# EAGLE board wavtrigger-Panel-v11 (EAGLE 6.5.0), part 1 of 3
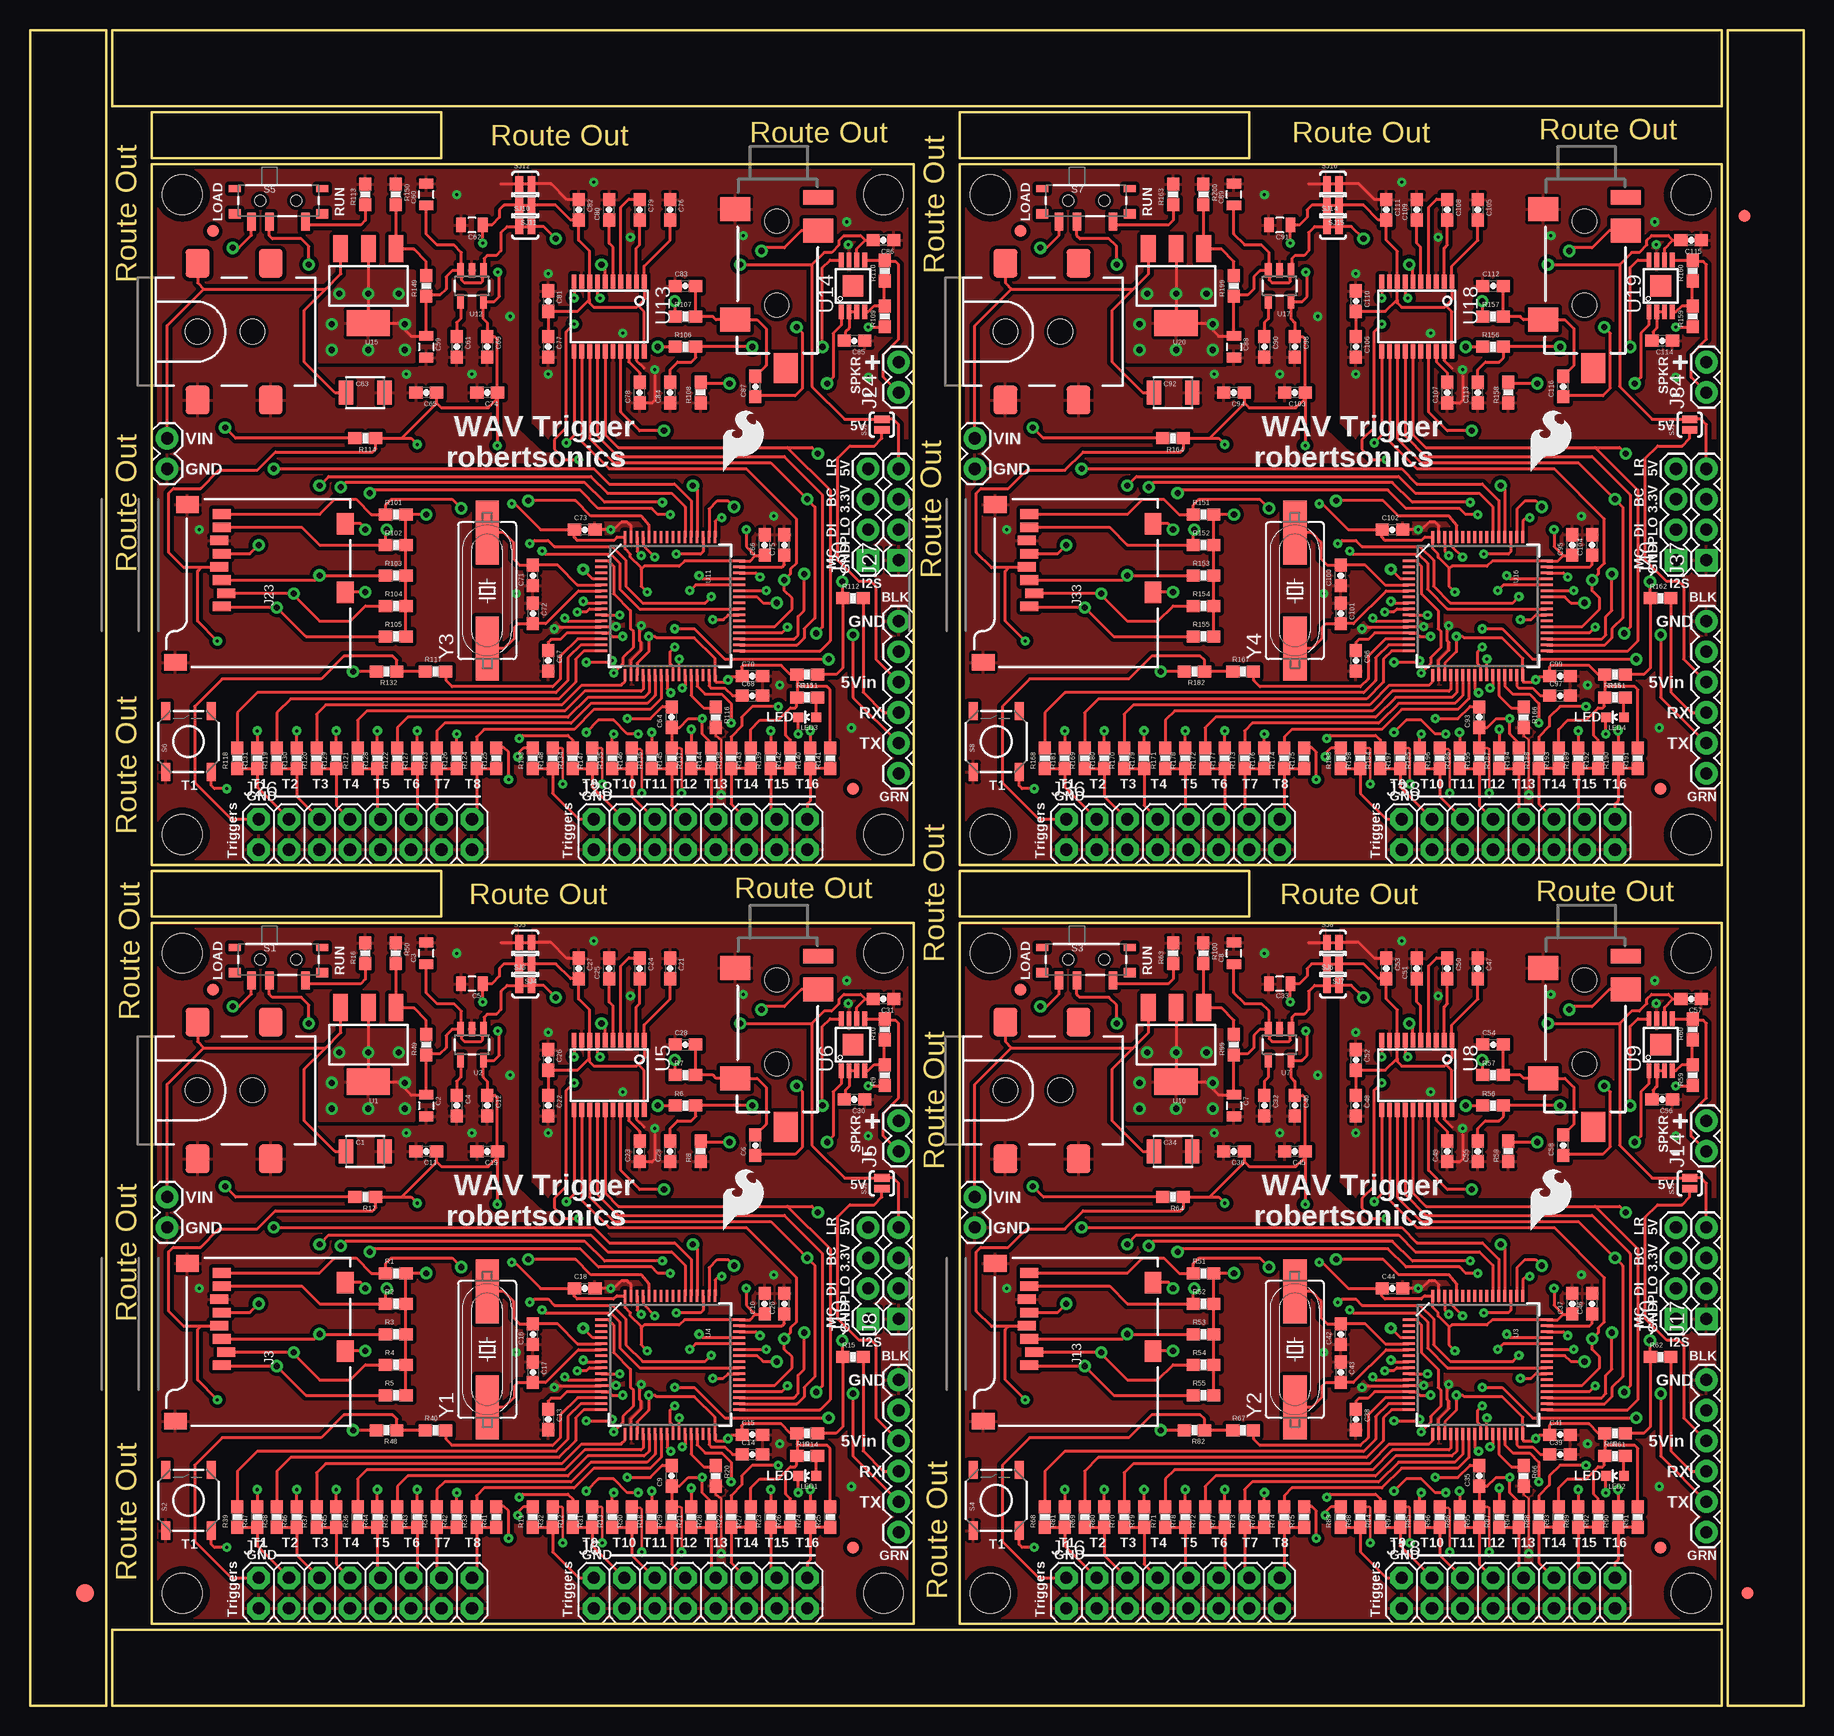
[diagram p0: board, top side]
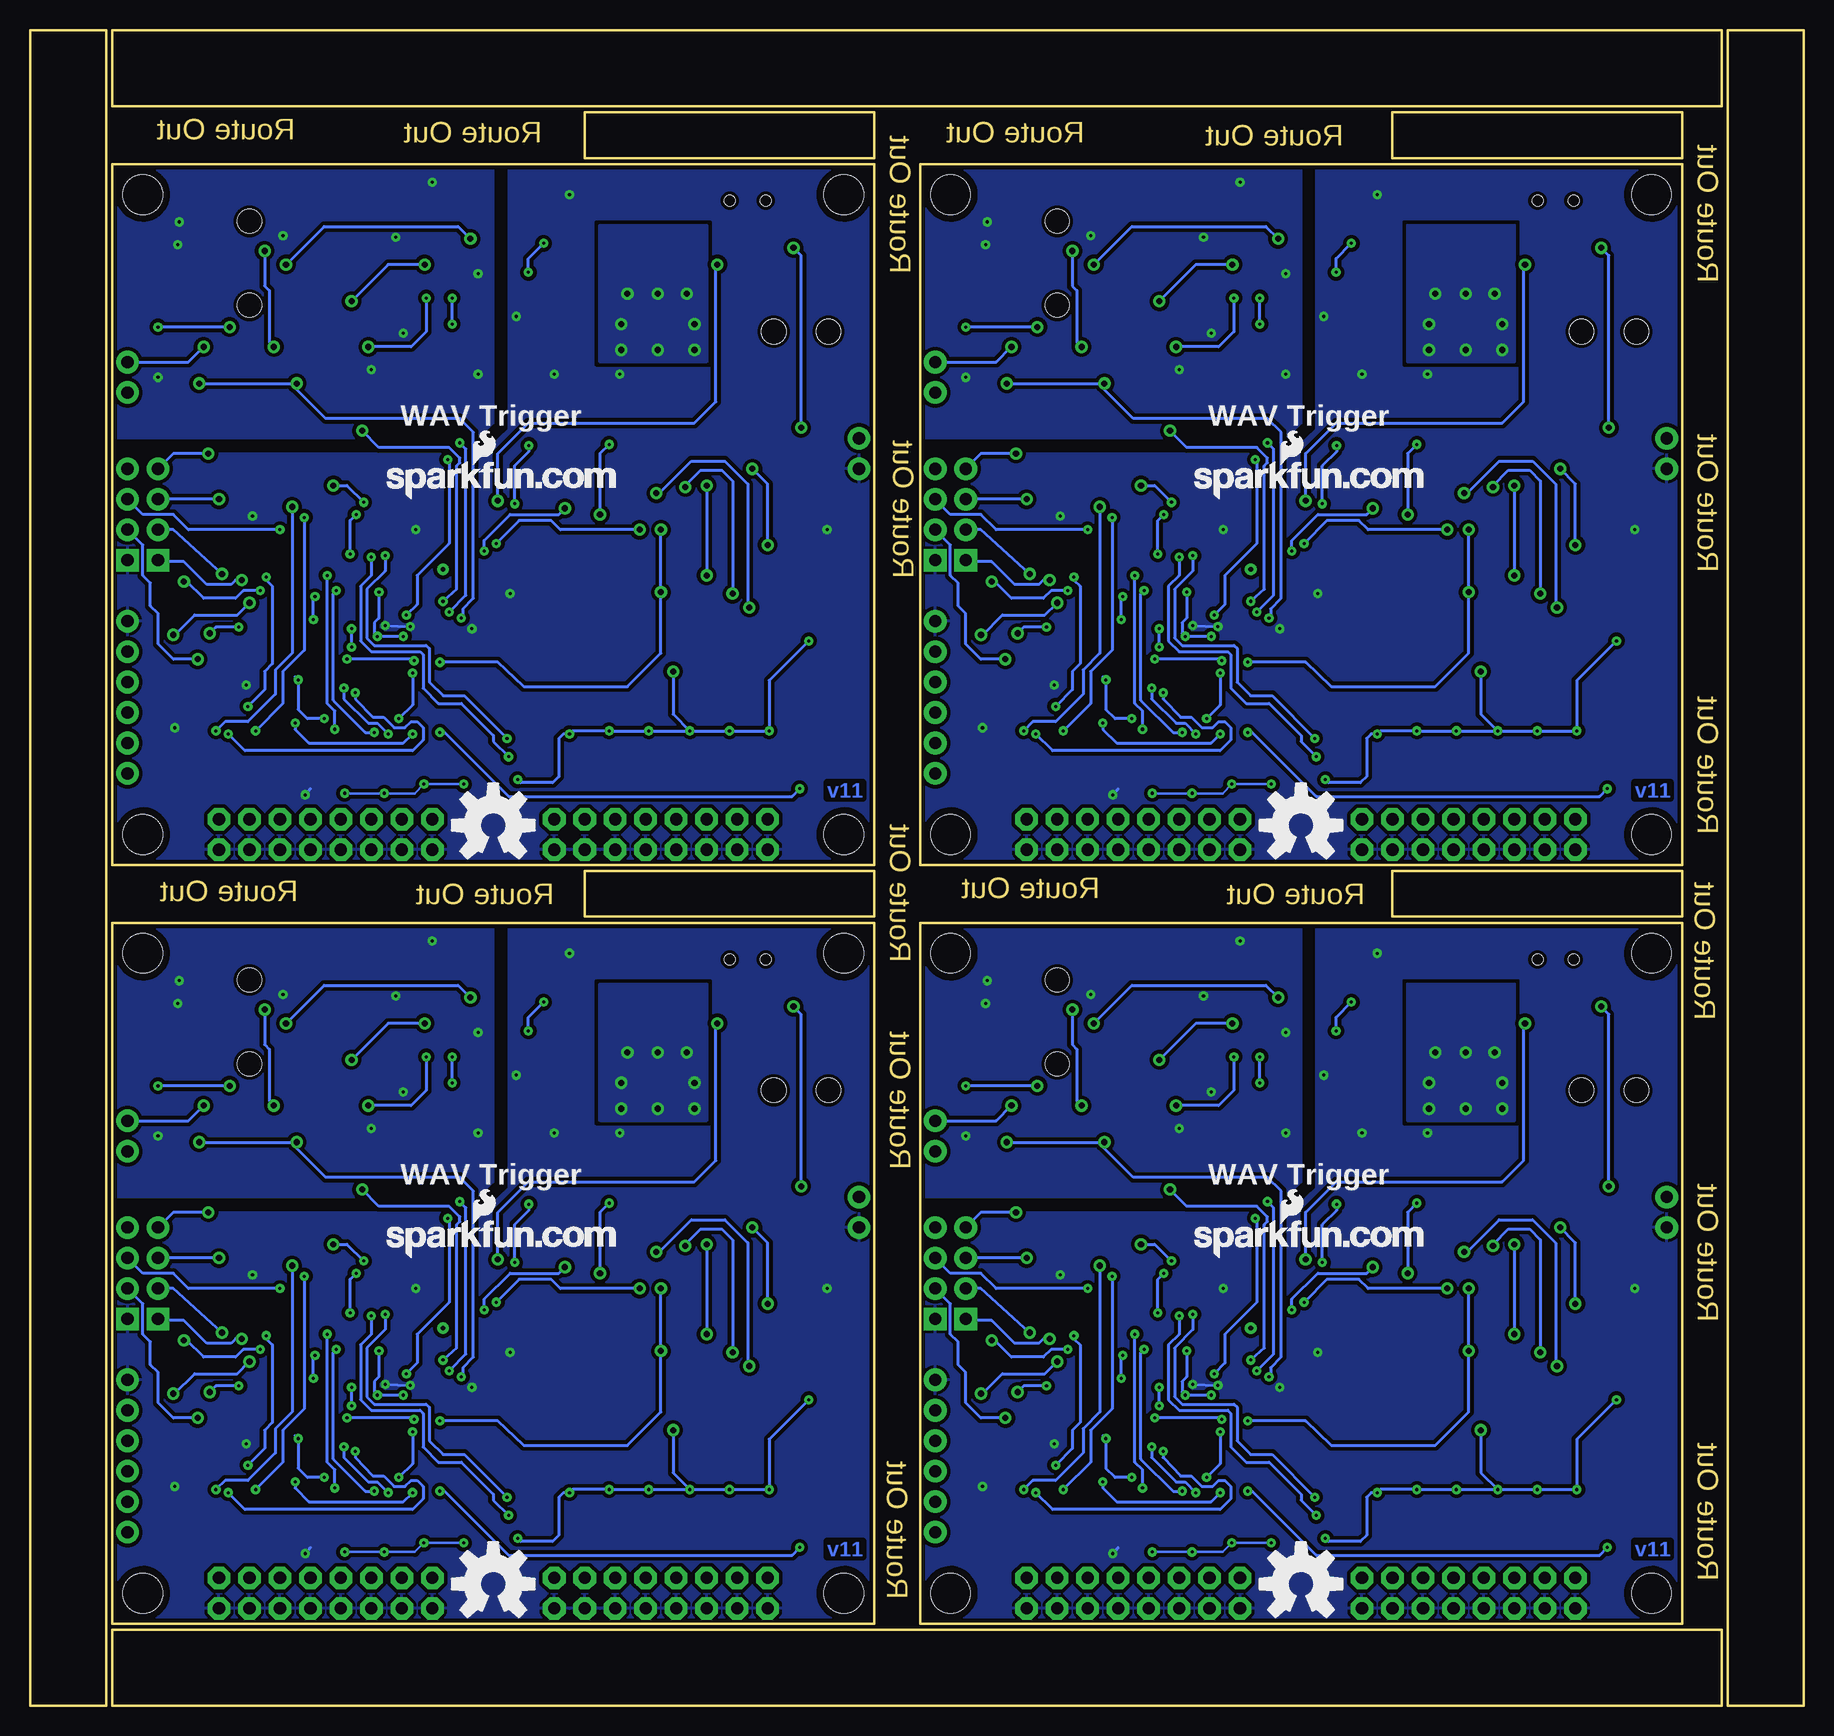
[diagram p1: board, bottom side, seen from below]

Size 147.83 x 139.7 mm. Coordinates in mm from the lower left corner, seen from the top.
Outline: 6.35,79.25 6.35,0 0,0 0,29.72
Outline: 0,28.45 0,139.7 6.35,139.7 6.35,77.98
Outline: 82.55,0 6.86,0 6.86,6.35 33.02,6.35
Outline: 29.21,6.35 140.97,6.35 140.97,0 78.74,0
Outline: 147.83,72.39 147.83,0 141.48,0 141.48,22.86
Outline: 141.48,21.59 141.48,139.7 147.83,139.7 147.83,71.12
Outline: 26.67,139.7 140.97,139.7 140.97,133.35 76.2,133.35
Outline: 82.55,133.35 6.86,133.35 6.86,139.7 33.02,139.7
Outline: 10.16,6.86 73.66,6.86 73.66,65.28 10.16,65.27 10.16,6.86
Outline: 77.47,6.86 140.97,6.86 140.97,65.28 77.47,65.27 77.47,6.86
Outline: 10.16,70.1 73.66,70.1 73.66,128.52 10.16,128.51 10.16,70.1
Outline: 77.47,70.1 140.97,70.1 140.97,128.52 77.47,128.51 77.47,70.1
Outline: 77.47,65.79 101.6,65.79 101.6,69.6 77.47,69.6 77.47,65.79
Outline: 10.16,129.03 34.29,129.03 34.29,132.84 10.16,132.84 10.16,129.03
Outline: 77.47,129.03 101.6,129.03 101.6,132.84 77.47,132.84 77.47,129.03
Outline: 10.16,65.79 34.29,65.79 34.29,69.6 10.16,69.6 10.16,65.79
Copper layers (1*16): Top 0.035mm / dielectric 1.5mm / Bottom 0.035mm
Design rules "SparkFun": minimum track width 8mil, minimum drill 20mil, track to track 8mil, track to pad 8mil, pad to pad 8mil, via to via 8mil, smd to smd 8mil, copper to edge 8mil, drill to drill 8mil, minimum pad ring 12mil, minimum via ring 10mil, stop-mask expansion 4mil, vias tented up to drill 20mil, thermal gap 10mil

## Footprints (pad centres in the part's own frame; a part is rotated, then mirrored left to right if it is on the bottom)
1210 = smd 1.2 x 2: 1 -1.6,0; 2 1.6,0
0805 = smd 0.8 x 1.2: 1 -0.9,0; 2 0.9,0
0603-CAP = smd 1.1 x 1: 1 -0.85,0; 2 0.85,0
FIDUCIAL-1.5X3 = smd 1.5 x 1.5: 1 0,0
FIDUCIAL-1X2 = smd 1 x 1: 1 0,0
POWER_JACK_SMD_OVERPASTE_REDBOARD_0603 = smd 2 x 2.4: GND 0,-5.7; P$4 6.1,-5.7; VIN0 0,5.7; VIN1 6.1,5.7 | hole 2.032: 0,0; 4.572,0
AUDIO-JACK-3.5MM-SMD = smd 2 x 2.5: RING 4.3,3.45; SLEEVE 2.5,-3.45; TIP 11.7,-3.45 | smd 1.2 x 2.5: RSH 1.5,3.45 | smd 2.5 x 2: TSH 15.75,0.75 | hole 2: 3.5,0; 10.5,0
MICRO-SD-SOCKET-PP = smd 0.8 x 1.5: 1 -8.94,10.7; 2 -7.84,10.3; 3 -6.74,10.7; 4 -5.64,10.9; 5 -4.54,10.7; 6 -3.44,10.9; 7 -2.34,10.7; 8 -1.24,10.7 | smd 1.8 x 1.4: CD1 -2.05,0.4; CD2 -7.75,0.4 | smd 1.4 x 1.9: GND1 -13.6,14.55; GND3 -0.45,13.55
1X06 = drill 1.016 pad 1.88: 1 0,0; 2 2.54,0; 3 5.08,0; 4 7.62,0; 5 10.16,0; 6 12.7,0
1X02 = drill 1.016 pad 1.88: 1 0,0; 2 2.54,0
2X8 = drill 1.016 pad 1.88 octagon: 1 0,0; 2 0,2.54; 3 2.54,0; 4 2.54,2.54; 5 5.08,0; 6 5.08,2.54; 7 7.62,0; 8 7.62,2.54; 9 10.16,0; 10 10.16,2.54; 11 12.7,0; 12 12.7,2.54; 13 15.24,0; 14 15.24,2.54; 15 17.78,0; 16 17.78,2.54
1X04 = drill 1.016 pad 1.88 square: 1 0,0 | drill 1.016 pad 1.88: 2 2.54,0; 3 5.08,0; 4 7.62,0
LED-0603 = smd 0.8 x 0.8: A 0,-0.75; C 0,0.75
0603-RES = smd 1.1 x 1: 1 -0.85,0; 2 0.85,0
SWITCH-SPST-SMD-A = smd 0.7 x 1.5: 1 -2.25,-1.75; 2 -0.75,-1.75; 3 2.25,-1.75 | smd 1 x 0.6: GND1 -3.65,1; GND3 3.65,1 | smd 1 x 0.8: GND2 -3.65,-1.1; GND4 3.65,-1.1 | hole 0.9: -1.5,0; 1.5,0
TACTILE_SWITCH_SMD = smd 1.524 x 0.762: 1 -2.54,1.905; 2 2.54,1.905; 3 -2.54,-1.905; 4 2.54,-1.905
SJ_2S-NO = smd 0.635 x 1.27: 1 -0.45,0; 2 0.45,0
SJ_2S-TRACE = smd 0.635 x 1.27: 1 -0.508,0; 2 0.508,0
STAND-OFF = hole 3.302: 0,0
TP_15TH = drill 0.381 pad 0.61: P$1 0,0
SOT223 = smd 1.219 x 2.235: 1 -2.311,-3.099; 2 0,-3.099; 3 2.311,-3.099 | smd 3.6 x 2.2: 4 0,3.099
SOT23-5 = smd 0.55 x 1.2: 1 -0.95,-1.3; 2 0,-1.3; 3 0.95,-1.3; 4 0.95,1.3; 5 -0.95,1.3
TQFP64 = smd 0.22 x 1: 1 -3.75,-5.75; 2 -3.25,-5.75; 3 -2.75,-5.75; 4 -2.25,-5.75; 5 -1.75,-5.75; 6 -1.25,-5.75; 7 -0.75,-5.75; 8 -0.25,-5.75; 9 0.25,-5.75; 10 0.75,-5.75; 11 1.25,-5.75; 12 1.75,-5.75; 13 2.25,-5.75; 14 2.75,-5.75; 15 3.25,-5.75; 16 3.75,-5.75; 33 3.75,5.75; 34 3.25,5.75; 35 2.75,5.75; 36 2.25,5.75; 37 1.75,5.75; 38 1.25,5.75; 39 0.75,5.75; 40 0.25,5.75; 41 -0.25,5.75; 42 -0.75,5.75; 43 -1.25,5.75; 44 -1.75,5.75; 45 -2.25,5.75; 46 -2.75,5.75; 47 -3.25,5.75; 48 -3.75,5.75 | smd 1 x 0.22: 17 5.75,-3.75; 18 5.75,-3.25; 19 5.75,-2.75; 20 5.75,-2.25; 21 5.75,-1.75; 22 5.75,-1.25; 23 5.75,-0.75; 24 5.75,-0.25; 25 5.75,0.25; 26 5.75,0.75; 27 5.75,1.25; 28 5.75,1.75; 29 5.75,2.25; 30 5.75,2.75; 31 5.75,3.25; 32 5.75,3.75; 49 -5.75,3.75; 50 -5.75,3.25; 51 -5.75,2.75; 52 -5.75,2.25; 53 -5.75,1.75; 54 -5.75,1.25; 55 -5.75,0.75; 56 -5.75,0.25; 57 -5.75,-0.25; 58 -5.75,-0.75; 59 -5.75,-1.25; 60 -5.75,-1.75; 61 -5.75,-2.25; 62 -5.75,-2.75; 63 -5.75,-3.25; 64 -5.75,-3.75
PW_R-PDSO-G20 = smd 0.4 x 1.2: 1 -2.925,-2.9; 2 -2.275,-2.9; 3 -1.625,-2.9; 4 -0.975,-2.9; 5 -0.325,-2.9; 6 0.325,-2.9; 7 0.975,-2.9; 8 1.625,-2.9; 9 2.275,-2.9; 10 2.925,-2.9; 11 2.925,2.9; 12 2.275,2.9; 13 1.625,2.9; 14 0.975,2.9; 15 0.325,2.9; 16 -0.325,2.9; 17 -0.975,2.9; 18 -1.625,2.9; 19 -2.275,2.9; 20 -2.925,2.9
S-PDSO-G08 = smd 0.4 x 1.2: 1 -0.975,-2.157; 2 -0.325,-2.157; 3 0.325,-2.157; 4 0.975,-2.157; 5 0.975,2.157; 6 0.325,2.157; 7 -0.325,2.157; 8 -0.975,2.157 | smd 1.73 x 1.78: TH 0,0
HC49UP = smd 5.334 x 1.93: 1 -4.826,0; 2 4.826,0

## Placement (x,y rotation side)
C1  10uF  [1210]  27.94,46.23 0 top
C2  10uF  [0805]  33.02,50.04 270 top
C3  2.2uF  [0805]  33.02,62.74 90 top
C4  0.1uF  [0603-CAP]  35.56,50.04 270 top
C5  2.2uF  [0805]  36.83,60.2 180 top
C6  .39uF  [0603-CAP]  60.45,46.74 90 top
C7  10uF  [0805]  100.33,50.04 270 top
C8  2.2uF  [0805]  100.33,62.74 90 top
C9  0.1uF  [0603-CAP]  53.47,19.18 90 top
C10  0.1uF  [0603-CAP]  61.21,33.53 90 top
C11  1uF  [0603-CAP]  33.02,46.23 180 top
C12  4.7uF  [0603-CAP]  38.1,50.04 270 top
C13  0.1uF  [0603-CAP]  43.18,23.88 270 top
C14  2.2uF  [0603-CAP]  60.2,20.95 0 top
C15  0.1uF  [0603-CAP]  60.2,22.61 0 top
C16  33pF  [0603-CAP]  41.91,30.99 90 top
C17  33pF  [0603-CAP]  41.91,27.81 270 top
C18  0.1uF  [0603-CAP]  46.23,34.8 0 top
C19  0.1uF  [0603-CAP]  38.1,46.23 180 top
C20  2.2uF  [0603-CAP]  62.87,33.53 90 top
C21  0.1uF  [0603-CAP]  53.34,61.47 270 top
C22  0.1uF  [0603-CAP]  43.18,50.04 270 top
C23  0.1uF  [0603-CAP]  50.8,46.23 90 top
C24  2.2uF  [0603-CAP]  50.8,61.47 270 top
C25  2.2uF  [0603-CAP]  48.26,61.47 90 top
C26  0.1uF  [0603-CAP]  43.18,53.85 270 top
C27  10uF  [0603-CAP]  45.72,61.47 270 top
C28  2200pF  [0603-CAP]  54.61,55.12 0 top
C29  2200pF  [0603-CAP]  53.34,46.23 90 top
C30  1uF  [0603-CAP]  68.71,50.55 180 top
C31  1uF  [0603-CAP]  71.12,58.93 180 top
C32  0.1uF  [0603-CAP]  102.87,50.04 270 top
C33  2.2uF  [0805]  104.14,60.2 180 top
C34  10uF  [1210]  95.25,46.23 0 top
C35  0.1uF  [0603-CAP]  120.78,19.18 90 top
C36  1uF  [0603-CAP]  100.33,46.23 180 top
C37  0.1uF  [0603-CAP]  128.52,33.53 90 top
C38  0.1uF  [0603-CAP]  110.49,23.88 270 top
C39  2.2uF  [0603-CAP]  127.51,20.95 0 top
C40  4.7uF  [0603-CAP]  105.41,50.04 270 top
C41  0.1uF  [0603-CAP]  127.51,22.61 0 top
C42  33pF  [0603-CAP]  109.22,30.99 90 top
C43  33pF  [0603-CAP]  109.22,27.81 270 top
C44  0.1uF  [0603-CAP]  113.54,34.8 0 top
C45  0.1uF  [0603-CAP]  105.41,46.23 180 top
C46  2.2uF  [0603-CAP]  130.18,33.53 90 top
C47  0.1uF  [0603-CAP]  120.65,61.47 270 top
C48  0.1uF  [0603-CAP]  110.49,50.04 270 top
C49  0.1uF  [0603-CAP]  118.11,46.23 90 top
C50  2.2uF  [0603-CAP]  118.11,61.47 270 top
C51  2.2uF  [0603-CAP]  115.57,61.47 90 top
C52  0.1uF  [0603-CAP]  110.49,53.85 270 top
C53  10uF  [0603-CAP]  113.03,61.47 270 top
C54  2200pF  [0603-CAP]  121.92,55.12 0 top
C55  2200pF  [0603-CAP]  120.65,46.23 90 top
C56  1uF  [0603-CAP]  136.02,50.55 180 top
C57  1uF  [0603-CAP]  138.43,58.93 180 top
C58  .39uF  [0603-CAP]  127.76,46.74 90 top
C59  10uF  [0805]  33.02,113.28 270 top
C60  2.2uF  [0805]  33.02,125.98 90 top
C61  0.1uF  [0603-CAP]  35.56,113.28 270 top
C62  2.2uF  [0805]  36.83,123.44 180 top
C63  10uF  [1210]  27.94,109.47 0 top
C64  0.1uF  [0603-CAP]  53.47,82.42 90 top
C65  1uF  [0603-CAP]  33.02,109.47 180 top
C66  0.1uF  [0603-CAP]  61.21,96.77 90 top
C67  0.1uF  [0603-CAP]  43.18,87.12 270 top
C68  2.2uF  [0603-CAP]  60.2,84.2 0 top
C69  4.7uF  [0603-CAP]  38.1,113.28 270 top
C70  0.1uF  [0603-CAP]  60.2,85.85 0 top
C71  33pF  [0603-CAP]  41.91,94.23 90 top
C72  33pF  [0603-CAP]  41.91,91.06 270 top
C73  0.1uF  [0603-CAP]  46.23,98.04 0 top
C74  0.1uF  [0603-CAP]  38.1,109.47 180 top
C75  2.2uF  [0603-CAP]  62.87,96.77 90 top
C76  0.1uF  [0603-CAP]  53.34,124.71 270 top
C77  0.1uF  [0603-CAP]  43.18,113.28 270 top
C78  0.1uF  [0603-CAP]  50.8,109.47 90 top
C79  2.2uF  [0603-CAP]  50.8,124.71 270 top
C80  2.2uF  [0603-CAP]  48.26,124.71 90 top
C81  0.1uF  [0603-CAP]  43.18,117.09 270 top
C82  10uF  [0603-CAP]  45.72,124.71 270 top
C83  2200pF  [0603-CAP]  54.61,118.36 0 top
C84  2200pF  [0603-CAP]  53.34,109.47 90 top
C85  1uF  [0603-CAP]  68.71,113.79 180 top
C86  1uF  [0603-CAP]  71.12,122.17 180 top
C87  .39uF  [0603-CAP]  60.45,109.98 90 top
C88  10uF  [0805]  100.33,113.28 270 top
C89  2.2uF  [0805]  100.33,125.98 90 top
C90  0.1uF  [0603-CAP]  102.87,113.28 270 top
C91  2.2uF  [0805]  104.14,123.44 180 top
C92  10uF  [1210]  95.25,109.47 0 top
C93  0.1uF  [0603-CAP]  120.78,82.42 90 top
C94  1uF  [0603-CAP]  100.33,109.47 180 top
C95  0.1uF  [0603-CAP]  128.52,96.77 90 top
C96  0.1uF  [0603-CAP]  110.49,87.12 270 top
C97  2.2uF  [0603-CAP]  127.51,84.2 0 top
C98  4.7uF  [0603-CAP]  105.41,113.28 270 top
C99  0.1uF  [0603-CAP]  127.51,85.85 0 top
C100  33pF  [0603-CAP]  109.22,94.23 90 top
C101  33pF  [0603-CAP]  109.22,91.06 270 top
C102  0.1uF  [0603-CAP]  113.54,98.04 0 top
C103  0.1uF  [0603-CAP]  105.41,109.47 180 top
C104  2.2uF  [0603-CAP]  130.18,96.77 90 top
C105  0.1uF  [0603-CAP]  120.65,124.71 270 top
C106  0.1uF  [0603-CAP]  110.49,113.28 270 top
C107  0.1uF  [0603-CAP]  118.11,109.47 90 top
C108  2.2uF  [0603-CAP]  118.11,124.71 270 top
C109  2.2uF  [0603-CAP]  115.57,124.71 90 top
C110  0.1uF  [0603-CAP]  110.49,117.09 270 top
C111  10uF  [0603-CAP]  113.03,124.71 270 top
C112  2200pF  [0603-CAP]  121.92,118.36 0 top
C113  2200pF  [0603-CAP]  120.65,109.47 90 top
C114  1uF  [0603-CAP]  136.02,113.79 180 top
C115  1uF  [0603-CAP]  138.43,122.17 180 top
C116  .39uF  [0603-CAP]  127.76,109.98 90 top
E$1  [FIDUCIAL-1.5X3]  4.57,9.4 0 top
E$5  [FIDUCIAL-1X2]  143.13,9.4 0 top
E$6  [FIDUCIAL-1X2]  142.88,124.21 180 top
FID1  FIDUCIAL1X2  [FIDUCIAL-1X2]  15.24,59.69 0 top
FID2  FIDUCIAL1X2  [FIDUCIAL-1X2]  68.58,13.21 0 top
FID3  FIDUCIAL1X2  [FIDUCIAL-1X2]  82.55,59.69 0 top
FID4  FIDUCIAL1X2  [FIDUCIAL-1X2]  135.89,13.21 0 top
FID5  FIDUCIAL1X2  [FIDUCIAL-1X2]  15.24,122.94 0 top
FID6  FIDUCIAL1X2  [FIDUCIAL-1X2]  68.58,76.45 0 top
FID7  FIDUCIAL1X2  [FIDUCIAL-1X2]  82.55,122.94 0 top
FID8  FIDUCIAL1X2  [FIDUCIAL-1X2]  135.89,76.45 0 top
J1  5.5x2.1mm Barrel  [POWER_JACK_SMD_OVERPASTE_REDBOARD_0603]  13.97,51.31 0 top
J2  [AUDIO-JACK-3.5MM-SMD]  62.23,64.01 270 top
J3  USD-SOCKETNEW  [MICRO-SD-SOCKET-PP]  26.67,37.34 90 top
J4  [1X06]  72.39,27.18 270 top
J5  M02PTH  [1X02]  72.39,46.23 90 top
J6  M08X2  [2X8]  46.99,8.13 0 top
J7  M08X2  [2X8]  19.05,8.13 0 top
J8  [1X04]  72.39,32.26 90 top
J9  M02PTH  [1X02]  11.43,39.88 90 top
J10  [1X04]  69.85,32.26 90 top
J11  5.5x2.1mm Barrel  [POWER_JACK_SMD_OVERPASTE_REDBOARD_0603]  81.28,51.31 0 top
J12  [AUDIO-JACK-3.5MM-SMD]  129.54,64.01 270 top
J13  USD-SOCKETNEW  [MICRO-SD-SOCKET-PP]  93.98,37.34 90 top
J14  M02PTH  [1X02]  139.7,46.23 90 top
J15  [1X06]  139.7,27.18 270 top
J16  M08X2  [2X8]  86.36,8.13 0 top
J17  [1X04]  139.7,32.26 90 top
J18  M08X2  [2X8]  114.3,8.13 0 top
J19  M02PTH  [1X02]  78.74,39.88 90 top
J20  [1X04]  137.16,32.26 90 top
J21  5.5x2.1mm Barrel  [POWER_JACK_SMD_OVERPASTE_REDBOARD_0603]  13.97,114.55 0 top
J22  [AUDIO-JACK-3.5MM-SMD]  62.23,127.25 270 top
J23  USD-SOCKETNEW  [MICRO-SD-SOCKET-PP]  26.67,100.58 90 top
J24  M02PTH  [1X02]  72.39,109.47 90 top
J25  [1X06]  72.39,90.42 270 top
J26  M08X2  [2X8]  19.05,71.37 0 top
J27  [1X04]  72.39,95.5 90 top
J28  M08X2  [2X8]  46.99,71.37 0 top
J29  M02PTH  [1X02]  11.43,103.12 90 top
J30  [1X04]  69.85,95.5 90 top
J31  5.5x2.1mm Barrel  [POWER_JACK_SMD_OVERPASTE_REDBOARD_0603]  81.28,114.55 0 top
J32  [AUDIO-JACK-3.5MM-SMD]  129.54,127.25 270 top
J33  USD-SOCKETNEW  [MICRO-SD-SOCKET-PP]  93.98,100.58 90 top
J34  M02PTH  [1X02]  139.7,109.47 90 top
J35  [1X06]  139.7,90.42 270 top
J36  M08X2  [2X8]  86.36,71.37 0 top
J37  [1X04]  139.7,95.5 90 top
J38  M08X2  [2X8]  114.3,71.37 0 top
J39  M02PTH  [1X02]  78.74,103.12 90 top
J40  [1X04]  137.16,95.5 90 top
LED1  [LED-0603]  64.77,19.18 90 top
LED2  [LED-0603]  132.08,19.18 90 top
LED3  [LED-0603]  64.77,82.42 90 top
LED4  [LED-0603]  132.08,82.42 90 top
LOGO1  OSHW-LOGOL  [OSHW-LOGO-L]  41.91,10.16 0 bottom
LOGO2  LOGO-SFENEW  [SFE-NEW-WEBLOGO]  50.8,37.34 0 bottom
LOGO3  OSHW-LOGOL  [OSHW-LOGO-L]  109.22,10.16 0 bottom
LOGO4  SFE_LOGO_FLAME.2_INCH  [SFE_LOGO_FLAME_.2]  57.4,39.37 0 top
LOGO5  LOGO-SFENEW  [SFE-NEW-WEBLOGO]  118.11,37.34 0 bottom
LOGO6  SFE_LOGO_FLAME.2_INCH  [SFE_LOGO_FLAME_.2]  124.71,39.37 0 top
LOGO7  OSHW-LOGOL  [OSHW-LOGO-L]  41.91,73.41 0 bottom
LOGO8  LOGO-SFENEW  [SFE-NEW-WEBLOGO]  50.8,100.58 0 bottom
LOGO9  SFE_LOGO_FLAME.2_INCH  [SFE_LOGO_FLAME_.2]  57.4,102.62 0 top
LOGO10  OSHW-LOGOL  [OSHW-LOGO-L]  109.22,73.41 0 bottom
LOGO11  LOGO-SFENEW  [SFE-NEW-WEBLOGO]  118.11,100.58 0 bottom
LOGO12  SFE_LOGO_FLAME.2_INCH  [SFE_LOGO_FLAME_.2]  124.71,102.62 0 top
R1  47K  [0603-RES]  30.48,36.07 0 top
R2  47K  [0603-RES]  30.48,33.53 0 top
R3  47K  [0603-RES]  30.48,30.99 0 top
R4  47K  [0603-RES]  30.48,28.45 0 top
R5  47K  [0603-RES]  30.48,25.91 0 top
R6  470  [0603-RES]  54.61,50.04 0 top
R7  470  [0603-RES]  54.61,52.58 0 top
R8  10K  [0603-RES]  55.88,46.23 90 top
R9  22K  [0603-RES]  71.25,52.58 90 top
R10  10K  [0603-RES]  71.25,56.39 90 top
R11  100  [0603-RES]  41.91,15.75 90 top
R12  100  [0603-RES]  45.21,15.75 90 top
R13  100  [0603-RES]  48.51,15.75 90 top
R14  10K  [0603-RES]  64.77,22.73 180 top
R15  100  [0603-RES]  68.58,29.08 0 top
R16  10K  [0603-RES]  27.94,62.74 90 top
R17  10K  [0603-RES]  27.94,42.42 180 top
R18  100  [0603-RES]  51.82,15.75 90 top
R19  330  [0603-RES]  64.77,20.83 0 top
R20  10K  [0603-RES]  57.15,19.18 270 top
R21  100  [0603-RES]  55.12,15.75 90 top
R22  100  [0603-RES]  58.42,15.75 90 top
R23  100  [0603-RES]  61.72,15.75 90 top
R24  100  [0603-RES]  65.02,15.75 90 top
R25  DNP  [0603-RES]  66.67,15.75 90 top
R26  DNP  [0603-RES]  63.37,15.75 90 top
R27  DNP  [0603-RES]  60.07,15.75 90 top
R28  DNP  [0603-RES]  56.77,15.75 90 top
R29  DNP  [0603-RES]  53.47,15.75 90 top
R30  DNP  [0603-RES]  50.16,15.75 90 top
R31  DNP  [0603-RES]  46.86,15.75 90 top
R32  DNP  [0603-RES]  43.56,15.75 90 top
R33  100  [0603-RES]  37.21,15.75 90 top
R34  100  [0603-RES]  33.91,15.75 90 top
R35  100  [0603-RES]  30.61,15.75 90 top
R36  100  [0603-RES]  27.3,15.75 90 top
R37  100  [0603-RES]  23.88,15.75 90 top
R38  100  [0603-RES]  20.57,15.75 90 top
R39  100  [0603-RES]  17.27,15.75 90 top
R40  100  [0603-RES]  33.78,22.99 0 top
R41  DNP  [0603-RES]  38.86,15.75 90 top
R42  DNP  [0603-RES]  35.56,15.75 90 top
R43  DNP  [0603-RES]  32.26,15.75 90 top
R44  DNP  [0603-RES]  28.96,15.75 90 top
R45  DNP  [0603-RES]  25.53,15.75 90 top
R46  DNP  [0603-RES]  22.23,15.75 90 top
R47  DNP  [0603-RES]  18.92,15.75 90 top
R48  DNP  [0603-RES]  29.72,22.99 180 top
R49  240  [0603-RES]  33.02,55.12 90 top
R50  715  [0603-RES]  30.48,62.74 270 top
R51  47K  [0603-RES]  97.79,36.07 0 top
R52  47K  [0603-RES]  97.79,33.53 0 top
R53  47K  [0603-RES]  97.79,30.99 0 top
R54  47K  [0603-RES]  97.79,28.45 0 top
R55  47K  [0603-RES]  97.79,25.91 0 top
R56  470  [0603-RES]  121.92,50.04 0 top
R57  470  [0603-RES]  121.92,52.58 0 top
R58  10K  [0603-RES]  123.19,46.23 90 top
R59  22K  [0603-RES]  138.56,52.58 90 top
R60  10K  [0603-RES]  138.56,56.39 90 top
R61  10K  [0603-RES]  132.08,22.73 180 top
R62  100  [0603-RES]  135.89,29.08 0 top
R63  10K  [0603-RES]  95.25,62.74 90 top
R64  10K  [0603-RES]  95.25,42.42 180 top
R65  330  [0603-RES]  132.08,20.83 0 top
R66  10K  [0603-RES]  124.46,19.18 270 top
R67  100  [0603-RES]  101.09,22.99 0 top
R68  100  [0603-RES]  84.58,15.75 90 top
R69  100  [0603-RES]  87.88,15.75 90 top
R70  100  [0603-RES]  91.19,15.75 90 top
R71  100  [0603-RES]  94.61,15.75 90 top
R72  100  [0603-RES]  97.92,15.75 90 top
R73  100  [0603-RES]  101.22,15.75 90 top
R74  100  [0603-RES]  104.52,15.75 90 top
R75  DNP  [0603-RES]  106.17,15.75 90 top
R76  DNP  [0603-RES]  102.87,15.75 90 top
R77  DNP  [0603-RES]  99.57,15.75 90 top
R78  DNP  [0603-RES]  96.27,15.75 90 top
R79  DNP  [0603-RES]  92.84,15.75 90 top
R80  DNP  [0603-RES]  89.53,15.75 90 top
R81  DNP  [0603-RES]  86.23,15.75 90 top
R82  DNP  [0603-RES]  97.03,22.99 180 top
R83  100  [0603-RES]  109.22,15.75 90 top
R84  100  [0603-RES]  112.52,15.75 90 top
R85  100  [0603-RES]  115.82,15.75 90 top
R86  100  [0603-RES]  119.13,15.75 90 top
R87  100  [0603-RES]  122.43,15.75 90 top
R88  100  [0603-RES]  125.73,15.75 90 top
R89  100  [0603-RES]  129.03,15.75 90 top
R90  100  [0603-RES]  132.33,15.75 90 top
R91  DNP  [0603-RES]  133.99,15.75 90 top
R92  DNP  [0603-RES]  130.68,15.75 90 top
R93  DNP  [0603-RES]  127.38,15.75 90 top
R94  DNP  [0603-RES]  124.08,15.75 90 top
R95  DNP  [0603-RES]  120.78,15.75 90 top
R96  DNP  [0603-RES]  117.47,15.75 90 top
R97  DNP  [0603-RES]  114.17,15.75 90 top
R98  DNP  [0603-RES]  110.87,15.75 90 top
R99  240  [0603-RES]  100.33,55.12 90 top
R100  715  [0603-RES]  97.79,62.74 270 top
R101  47K  [0603-RES]  30.48,99.31 0 top
R102  47K  [0603-RES]  30.48,96.77 0 top
R103  47K  [0603-RES]  30.48,94.23 0 top
R104  47K  [0603-RES]  30.48,91.69 0 top
R105  47K  [0603-RES]  30.48,89.15 0 top
R106  470  [0603-RES]  54.61,113.28 0 top
R107  470  [0603-RES]  54.61,115.82 0 top
R108  10K  [0603-RES]  55.88,109.47 90 top
R109  22K  [0603-RES]  71.25,115.82 90 top
R110  10K  [0603-RES]  71.25,119.63 90 top
R111  10K  [0603-RES]  64.77,85.98 180 top
R112  100  [0603-RES]  68.58,92.33 0 top
R113  10K  [0603-RES]  27.94,125.98 90 top
R114  10K  [0603-RES]  27.94,105.66 180 top
R115  330  [0603-RES]  64.77,84.07 0 top
R116  10K  [0603-RES]  57.15,82.42 270 top
R117  100  [0603-RES]  33.78,86.23 0 top
R118  100  [0603-RES]  17.27,78.99 90 top
R119  100  [0603-RES]  20.57,78.99 90 top
R120  100  [0603-RES]  23.88,78.99 90 top
R121  100  [0603-RES]  27.3,78.99 90 top
R122  100  [0603-RES]  30.61,78.99 90 top
R123  100  [0603-RES]  33.91,78.99 90 top
R124  100  [0603-RES]  37.21,78.99 90 top
R125  DNP  [0603-RES]  38.86,78.99 90 top
R126  DNP  [0603-RES]  35.56,78.99 90 top
R127  DNP  [0603-RES]  32.26,78.99 90 top
R128  DNP  [0603-RES]  28.96,78.99 90 top
R129  DNP  [0603-RES]  25.53,78.99 90 top
R130  DNP  [0603-RES]  22.23,78.99 90 top
R131  DNP  [0603-RES]  18.92,78.99 90 top
R132  DNP  [0603-RES]  29.72,86.23 180 top
R133  100  [0603-RES]  41.91,78.99 90 top
R134  100  [0603-RES]  45.21,78.99 90 top
R135  100  [0603-RES]  48.51,78.99 90 top
R136  100  [0603-RES]  51.82,78.99 90 top
R137  100  [0603-RES]  55.12,78.99 90 top
R138  100  [0603-RES]  58.42,78.99 90 top
R139  100  [0603-RES]  61.72,78.99 90 top
R140  100  [0603-RES]  65.02,78.99 90 top
R141  DNP  [0603-RES]  66.67,78.99 90 top
R142  DNP  [0603-RES]  63.37,78.99 90 top
R143  DNP  [0603-RES]  60.07,78.99 90 top
R144  DNP  [0603-RES]  56.77,78.99 90 top
R145  DNP  [0603-RES]  53.47,78.99 90 top
R146  DNP  [0603-RES]  50.16,78.99 90 top
R147  DNP  [0603-RES]  46.86,78.99 90 top
R148  DNP  [0603-RES]  43.56,78.99 90 top
R149  240  [0603-RES]  33.02,118.36 90 top
R150  715  [0603-RES]  30.48,125.98 270 top
R151  47K  [0603-RES]  97.79,99.31 0 top
R152  47K  [0603-RES]  97.79,96.77 0 top
R153  47K  [0603-RES]  97.79,94.23 0 top
R154  47K  [0603-RES]  97.79,91.69 0 top
R155  47K  [0603-RES]  97.79,89.15 0 top
R156  470  [0603-RES]  121.92,113.28 0 top
R157  470  [0603-RES]  121.92,115.82 0 top
R158  10K  [0603-RES]  123.19,109.47 90 top
R159  22K  [0603-RES]  138.56,115.82 90 top
R160  10K  [0603-RES]  138.56,119.63 90 top
R161  10K  [0603-RES]  132.08,85.98 180 top
R162  100  [0603-RES]  135.89,92.33 0 top
R163  10K  [0603-RES]  95.25,125.98 90 top
R164  10K  [0603-RES]  95.25,105.66 180 top
R165  330  [0603-RES]  132.08,84.07 0 top
R166  10K  [0603-RES]  124.46,82.42 270 top
R167  100  [0603-RES]  101.09,86.23 0 top
R168  100  [0603-RES]  84.58,78.99 90 top
R169  100  [0603-RES]  87.88,78.99 90 top
R170  100  [0603-RES]  91.19,78.99 90 top
R171  100  [0603-RES]  94.61,78.99 90 top
R172  100  [0603-RES]  97.92,78.99 90 top
R173  100  [0603-RES]  101.22,78.99 90 top
R174  100  [0603-RES]  104.52,78.99 90 top
R175  DNP  [0603-RES]  106.17,78.99 90 top
R176  DNP  [0603-RES]  102.87,78.99 90 top
R177  DNP  [0603-RES]  99.57,78.99 90 top
R178  DNP  [0603-RES]  96.27,78.99 90 top
R179  DNP  [0603-RES]  92.84,78.99 90 top
R180  DNP  [0603-RES]  89.53,78.99 90 top
R181  DNP  [0603-RES]  86.23,78.99 90 top
R182  DNP  [0603-RES]  97.03,86.23 180 top
R183  100  [0603-RES]  109.22,78.99 90 top
R184  100  [0603-RES]  112.52,78.99 90 top
R185  100  [0603-RES]  115.82,78.99 90 top
R186  100  [0603-RES]  119.13,78.99 90 top
R187  100  [0603-RES]  122.43,78.99 90 top
R188  100  [0603-RES]  125.73,78.99 90 top
R189  100  [0603-RES]  129.03,78.99 90 top
R190  100  [0603-RES]  132.33,78.99 90 top
R191  DNP  [0603-RES]  133.99,78.99 90 top
R192  DNP  [0603-RES]  130.68,78.99 90 top
R193  DNP  [0603-RES]  127.38,78.99 90 top
R194  DNP  [0603-RES]  124.08,78.99 90 top
R195  DNP  [0603-RES]  120.78,78.99 90 top
R196  DNP  [0603-RES]  117.47,78.99 90 top
R197  DNP  [0603-RES]  114.17,78.99 90 top
R198  DNP  [0603-RES]  110.87,78.99 90 top
R199  240  [0603-RES]  100.33,118.36 90 top
R200  715  [0603-RES]  97.79,125.98 270 top
S1  [SWITCH-SPST-SMD-A]  20.7,62.23 0 top
S2  SWITCH-MOMENTARY-2SMD  [TACTILE_SWITCH_SMD]  13.21,17.14 90 top
S3  [SWITCH-SPST-SMD-A]  88.01,62.23 0 top
S4  SWITCH-MOMENTARY-2SMD  [TACTILE_SWITCH_SMD]  80.52,17.14 90 top
S5  [SWITCH-SPST-SMD-A]  20.7,125.48 0 top
S6  SWITCH-MOMENTARY-2SMD  [TACTILE_SWITCH_SMD]  13.21,80.39 90 top
S7  [SWITCH-SPST-SMD-A]  88.01,125.48 0 top
S8  SWITCH-MOMENTARY-2SMD  [TACTILE_SWITCH_SMD]  80.52,80.39 90 top
SJ1  SOLDERJUMPERNO  [SJ_2S-NO]  138.3,43.56 90 top
SJ2  SOLDERJUMPERNO  [SJ_2S-NO]  70.99,43.56 90 top
SJ3  SOLDERJUMPERTRACE  [SJ_2S-TRACE]  41.27,60.07 0 top
SJ4  SOLDERJUMPERTRACE  [SJ_2S-TRACE]  41.27,61.85 180 top
SJ5  SOLDERJUMPERTRACE  [SJ_2S-TRACE]  41.27,63.63 0 top
SJ6  SOLDERJUMPERTRACE  [SJ_2S-TRACE]  108.58,60.07 0 top
SJ7  SOLDERJUMPERTRACE  [SJ_2S-TRACE]  108.58,61.85 180 top
SJ8  SOLDERJUMPERTRACE  [SJ_2S-TRACE]  108.58,63.63 0 top
SJ9  SOLDERJUMPERNO  [SJ_2S-NO]  70.99,106.81 90 top
SJ10  SOLDERJUMPERTRACE  [SJ_2S-TRACE]  41.27,123.32 0 top
SJ11  SOLDERJUMPERTRACE  [SJ_2S-TRACE]  41.27,125.09 180 top
SJ12  SOLDERJUMPERTRACE  [SJ_2S-TRACE]  41.27,126.87 0 top
SJ13  SOLDERJUMPERNO  [SJ_2S-NO]  138.3,106.81 90 top
SJ14  SOLDERJUMPERTRACE  [SJ_2S-TRACE]  108.58,123.32 0 top
SJ15  SOLDERJUMPERTRACE  [SJ_2S-TRACE]  108.58,125.09 180 top
SJ16  SOLDERJUMPERTRACE  [SJ_2S-TRACE]  108.58,126.87 0 top
STANDOFF1  STAND-OFF  [STAND-OFF]  12.7,9.4 0 top
STANDOFF2  STAND-OFF  [STAND-OFF]  71.12,9.4 0 top
STANDOFF3  STAND-OFF  [STAND-OFF]  12.7,62.74 0 top
STANDOFF4  STAND-OFF  [STAND-OFF]  71.12,62.74 0 top
STANDOFF5  STAND-OFF  [STAND-OFF]  80.01,9.4 0 top
STANDOFF6  STAND-OFF  [STAND-OFF]  138.43,9.4 0 top
STANDOFF7  STAND-OFF  [STAND-OFF]  80.01,62.74 0 top
STANDOFF8  STAND-OFF  [STAND-OFF]  138.43,62.74 0 top
STANDOFF9  STAND-OFF  [STAND-OFF]  12.7,72.64 0 top
STANDOFF10  STAND-OFF  [STAND-OFF]  71.12,72.64 0 top
STANDOFF11  STAND-OFF  [STAND-OFF]  12.7,125.98 0 top
STANDOFF12  STAND-OFF  [STAND-OFF]  71.12,125.98 0 top
STANDOFF13  STAND-OFF  [STAND-OFF]  80.01,72.64 0 top
STANDOFF14  STAND-OFF  [STAND-OFF]  138.43,72.64 0 top
STANDOFF15  STAND-OFF  [STAND-OFF]  80.01,125.98 0 top
STANDOFF16  STAND-OFF  [STAND-OFF]  138.43,125.98 0 top
TP1  TEST-POINTTP_15TH_THRU  [TP_15TH]  46.1,31.5 0 top
TP2  TEST-POINTTP_15TH_THRU  [TP_15TH]  113.41,31.5 0 top
TP3  TEST-POINTTP_15TH_THRU  [TP_15TH]  46.1,94.74 0 top
TP4  TEST-POINTTP_15TH_THRU  [TP_15TH]  113.41,94.74 0 top
U1  [SOT223]  28.19,55.12 180 top
U2  MIC5323-3.3  [SOT23-5]  36.83,55.12 180 top
U3  STM32F405RG  [TQFP64]  120.65,28.45 270 top
U4  STM32F405RG  [TQFP64]  53.34,28.45 270 top
U5  PCM5100  [PW_R-PDSO-G20]  48.26,52.58 180 top
U6  LM4990  [S-PDSO-G08]  68.58,55.12 0 top
U7  MIC5323-3.3  [SOT23-5]  104.14,55.12 180 top
U8  PCM5100  [PW_R-PDSO-G20]  115.57,52.58 180 top
U9  LM4990  [S-PDSO-G08]  135.89,55.12 0 top
U10  [SOT223]  95.5,55.12 180 top
U11  STM32F405RG  [TQFP64]  53.34,91.69 270 top
U12  MIC5323-3.3  [SOT23-5]  36.83,118.36 180 top
U13  PCM5100  [PW_R-PDSO-G20]  48.26,115.82 180 top
U14  LM4990  [S-PDSO-G08]  68.58,118.36 0 top
U15  [SOT223]  28.19,118.36 180 top
U16  STM32F405RG  [TQFP64]  120.65,91.69 270 top
U17  MIC5323-3.3  [SOT23-5]  104.14,118.36 180 top
U18  PCM5100  [PW_R-PDSO-G20]  115.57,115.82 180 top
U19  LM4990  [S-PDSO-G08]  135.89,118.36 0 top
U20  [SOT223]  95.5,118.36 180 top
Y1  8MHz  [HC49UP]  38.1,29.72 90 top
Y2  8MHz  [HC49UP]  105.41,29.72 90 top
Y3  8MHz  [HC49UP]  38.1,92.96 90 top
Y4  8MHz  [HC49UP]  105.41,92.96 90 top

## Library data of the parts
C1 C34 C63 C92 = SparkFun-Capacitors; PROD_ID: CAP-09824
C2 C3 C5 C7 C8 C33 C59 C60 C62 C88 C89 C91 = SparkFun-Capacitors; PROD_ID: CAP-08064
C4 C6 C9-C32 C35-C58 C61 C64-C87 C90 C93-C116 = SparkFun-Capacitors
E$1 = SparkFun-Retired
E$5 E$6 FID1-FID8 LOGO1-LOGO12 = SparkFun-Aesthetics
J1 J11 J21 J31 = Testing
J2 J4-J10 J12 J14-J20 J22 J24-J30 J32 J34-J40 = SparkFun-Connectors
J3 J13 J23 J33 U5 U6 U8 U9 U13 U14 U18 U19 = robertsonics
LED1-LED4 = SparkFun-LED
R1-R48 R51-R98 R101-R148 R151-R198 SJ1-SJ16 TP1-TP4 = SparkFun-Passives
R49 R99 R149 R199 = SparkFun-Resistors; PROD_ID: RES-07849
R50 R100 R150 R200 = SparkFun-Resistors
S1-S8 STANDOFF1-STANDOFF16 = SparkFun-Electromechanical
U1 U10 U15 U20 = SparkFun-PowerIC
U2 U7 U12 U17 = SparkFun-PowerIC; PROD_ID: VREG-00822
U3 U4 U11 U16 = SparkFun-DigitalIC
Y1-Y4 = SparkFun-FreqCtrl

## Nets
+5V: C2.1 C3.1 C31.2 J8.4 R49.1 SJ2.2 SJ3.1 SJ3.2 U1.2 U1.4 U2.1 U2.3 U6.6
+5V1: C7.1 C8.1 C57.2 J17.4 R99.1 SJ1.2 SJ6.1 SJ6.2 U7.1 U7.3 U9.6 U10.2 U10.4
+5V2: C59.1 C60.1 C86.2 J27.4 R149.1 SJ9.2 SJ10.1 SJ10.2 U12.1 U12.3 U14.6 U15.2 U15.4
+5V3: C88.1 C89.1 C115.2 J37.4 R199.1 SJ13.2 SJ14.1 SJ14.2 U17.1 U17.3 U19.6 U20.2 U20.4
AMPENA: R8.2 U4.11 U6.1
AMPENA1: R58.2 U3.11 U9.1
AMPENA2: R108.2 U11.11 U14.1
AMPENA3: R158.2 U16.11 U19.1
BOOT0: S1.2 U4.60
BOOT1: S3.2 U3.60
BOOT2: S5.2 U11.60
BOOT3: S7.2 U16.60
BUTTON: S2.3 U4.27
BUTTON1: S4.3 U3.27
BUTTON2: S6.3 U11.27
BUTTON3: S8.3 U16.27
DEMP: U4.10 U5.10
DEMP1: U3.10 U8.10
DEMP2: U11.10 U13.10
DEMP3: U16.10 U18.10
FILTER: U4.9 U5.11
FILTER1: U3.9 U8.11
FILTER2: U11.9 U13.11
FILTER3: U16.9 U18.11
GND: C1.2 C2.2 C3.2 C4.2 C5.2 C10.2 C11.2 C12.2 C13.2 C14.2 C15.2 C16.1 C17.1 C18.2 C19.2 C20.2 C21.1 C22.2 C23.1 C25.2 C26.1 C27.1 C28.1 C29.1 C30.1 C31.1 J1.GND J1.P$4 J2.SLEEVE J3.6 J3.GND1 J3.GND3 J4.1 J6.1 J6.3 J6.5 J6.7 J6.9 J6.11 J6.13 J6.15 J7.1 J7.3 J7.5 J7.7 J7.9 J7.11 J7.13 J7.15 J8.1 J9.1 R8.1 R16.2 R20.2 R50.1 S2.1 SJ5.1 SJ5.2 U2.2 U4.12 U4.18 U4.63 U5.3 U5.9 U5.16 U5.19 U6.7
GND1: C7.2 C8.2 C32.2 C33.2 C34.2 C36.2 C37.2 C38.2 C39.2 C40.2 C41.2 C42.1 C43.1 C44.2 C45.2 C46.2 C47.1 C48.2 C49.1 C51.2 C52.1 C53.1 C54.1 C55.1 C56.1 C57.1 J11.GND J11.P$4 J12.SLEEVE J13.6 J13.GND1 J13.GND3 J15.1 J16.1 J16.3 J16.5 J16.7 J16.9 J16.11 J16.13 J16.15 J17.1 J18.1 J18.3 J18.5 J18.7 J18.9 J18.11 J18.13 J18.15 J19.1 R58.1 R63.2 R66.2 R100.1 S4.1 SJ8.1 SJ8.2 U3.12 U3.18 U3.63 U7.2 U8.3 U8.9 U8.16 U8.19 U9.7
GND2: C59.2 C60.2 C61.2 C62.2 C63.2 C65.2 C66.2 C67.2 C68.2 C69.2 C70.2 C71.1 C72.1 C73.2 C74.2 C75.2 C76.1 C77.2 C78.1 C80.2 C81.1 C82.1 C83.1 C84.1 C85.1 C86.1 J21.GND J21.P$4 J22.SLEEVE J23.6 J23.GND1 J23.GND3 J25.1 J26.1 J26.3 J26.5 J26.7 J26.9 J26.11 J26.13 J26.15 J27.1 J28.1 J28.3 J28.5 J28.7 J28.9 J28.11 J28.13 J28.15 J29.1 R108.1 R113.2 R116.2 R150.1 S6.1 SJ12.1 SJ12.2 U11.12 U11.18 U11.63 U12.2 U13.3 U13.9 U13.16 U13.19 U14.7
GND3: C88.2 C89.2 C90.2 C91.2 C92.2 C94.2 C95.2 C96.2 C97.2 C98.2 C99.2 C100.1 C101.1 C102.2 C103.2 C104.2 C105.1 C106.2 C107.1 C109.2 C110.1 C111.1 C112.1 C113.1 C114.1 C115.1 J31.GND J31.P$4 J32.SLEEVE J33.6 J33.GND1 J33.GND3 J35.1 J36.1 J36.3 J36.5 J36.7 J36.9 J36.11 J36.13 J36.15 J37.1 J38.1 J38.3 J38.5 J38.7 J38.9 J38.11 J38.13 J38.15 J39.1 R158.1 R163.2 R166.2 R200.1 S8.1 SJ16.1 SJ16.2 U16.12 U16.18 U16.63 U17.2 U18.3 U18.9 U18.16 U18.19 U19.7
I2S_BCLK: J10.3 U4.34 U5.13
I2S_BCLK1: J20.3 U3.34 U8.13
I2S_BCLK2: J30.3 U11.34 U13.13
I2S_BCLK3: J40.3 U16.34 U18.13
I2S_DI: J10.2 U4.35
I2S_DI1: J20.2 U3.35
I2S_DI2: J30.2 U11.35
I2S_DI3: J40.2 U16.35
I2S_DOUT: U4.36 U5.14
I2S_DOUT1: U3.36 U8.14
I2S_DOUT2: U11.36 U13.14
I2S_DOUT3: U16.36 U18.14
I2S_LRCK: J10.4 U4.33 U5.15
I2S_LRCK1: J20.4 U3.33 U8.15
I2S_LRCK2: J30.4 U11.33 U13.15
I2S_LRCK3: J40.4 U16.33 U18.15
I2S_MCLK: J10.1 U4.37 U5.12
I2S_MCLK1: J20.1 U3.37 U8.12
I2S_MCLK2: J30.1 U11.37 U13.12
I2S_MCLK3: J40.1 U16.37 U18.12
LED1: LED1.C U4.24
LED2: LED2.C U3.24
LED3: LED3.C U11.24
LED4: LED4.C U16.24
LOUTL: C6.2 C28.2 J2.TIP R7.2
LOUTL1: C54.2 C58.2 J12.TIP R57.2
LOUTL2: C83.2 C87.2 J22.TIP R107.2
LOUTL3: C112.2 C116.2 J32.TIP R157.2
LOUTR: C29.2 J2.RING R6.2
LOUTR1: C55.2 J12.RING R56.2
LOUTR2: C84.2 J22.RING R106.2
LOUTR3: C113.2 J32.RING R156.2
MUTE: U4.8 U5.17
MUTE1: U3.8 U8.17
MUTE2: U11.8 U13.17
MUTE3: U16.8 U18.17
N$1: J6.2 R11.1 R32.1
N$2: C4.1 U2.4
N$3: C9.2 U4.1
N$4: C14.1 U4.31
N$5: C16.2 U4.5 Y1.2
N$6: C17.2 U4.6 Y1.1
N$7: R16.1 S1.3
N$8: C20.1 U4.47
N$9: J4.4 R15.2
N$10: R17.2 S1.1
N$11: LED1.A R19.2
N$12: R20.1 U4.28
N$13: R49.2 R50.2 U1.1
N$14: C23.2 U5.18
N$15: R6.1 U5.7
N$16: C24.2 U5.2
N$17: C24.1 U5.4
N$18: C25.1 U5.5
N$19: R7.1 U5.6
N$20: C30.2 U6.2 U6.3
N$21: C6.1 R9.1
N$22: TP1.P$1 U4.4
N$23: J6.4 R12.1 R31.1
N$24: J6.6 R13.1 R30.1
N$25: J6.8 R18.1 R29.1
N$26: J6.10 R21.1 R28.1
N$27: J6.12 R22.1 R27.1
N$28: J6.14 R23.1 R26.1
N$29: R9.2 R10.1 U6.4
N$30: J6.16 R24.1 R25.1
N$31: C32.1 U7.4
N$32: J4.3 SJ2.1
N$33: C35.2 U3.1
N$34: C39.1 U3.31
N$35: J7.2 R40.1 R48.1
N$36: J7.4 R39.1 R47.1
N$37: J7.6 R38.1 R46.1
N$38: J7.8 R37.1 R45.1
N$39: J7.10 R36.1 R44.1
N$40: J7.12 R35.1 R43.1
N$41: J7.14 R34.1 R42.1
N$42: J7.16 R33.1 R41.1
N$43: C42.2 U3.5 Y2.2
N$44: C43.2 U3.6 Y2.1
N$45: C46.1 U3.47
N$46: C49.2 U8.18
N$47: C50.2 U8.2
N$48: C50.1 U8.4
N$49: C51.1 U8.5
N$50: R56.1 U8.7
N$51: R57.1 U8.6
N$52: C56.2 U9.2 U9.3
N$53: R59.2 R60.1 U9.4
N$54: J15.4 R62.2
N$55: R63.1 S3.3
N$56: R64.2 S3.1
N$57: LED2.A R65.2
N$58: R66.1 U3.28
N$59: J15.3 SJ1.1
N$60: J16.2 R67.1 R82.1
N$61: J16.4 R68.1 R81.1
N$62: J16.6 R69.1 R80.1
N$63: J16.8 R70.1 R79.1
N$64: J16.10 R71.1 R78.1
N$65: J16.12 R72.1 R77.1
N$66: J16.14 R73.1 R76.1
N$67: J16.16 R74.1 R75.1
N$68: J18.2 R83.1 R98.1
N$69: J18.4 R84.1 R97.1
N$70: J18.6 R85.1 R96.1
N$71: J18.8 R86.1 R95.1
N$72: J18.10 R87.1 R94.1
N$73: J18.12 R88.1 R93.1
N$74: J18.14 R89.1 R92.1
N$75: J18.16 R90.1 R91.1
N$76: R99.2 R100.2 U10.1
N$77: C58.1 R59.1
N$78: TP2.P$1 U3.4
N$79: C61.1 U12.4
N$80: C64.2 U11.1
N$81: C68.1 U11.31
N$82: C71.2 U11.5 Y3.2
N$83: C72.2 U11.6 Y3.1
N$84: C75.1 U11.47
N$85: C78.2 U13.18
N$86: C79.2 U13.2
N$87: C79.1 U13.4
N$88: C80.1 U13.5
N$89: R106.1 U13.7
N$90: R107.1 U13.6
N$91: C85.2 U14.2 U14.3
N$92: R109.2 R110.1 U14.4
N$93: J25.4 R112.2
N$94: R113.1 S5.3
N$95: R114.2 S5.1
N$96: LED3.A R115.2
N$97: R116.1 U11.28
N$98: J25.3 SJ9.1
N$99: J26.2 R117.1 R132.1
N$100: J26.4 R118.1 R131.1
N$101: J26.6 R119.1 R130.1
N$102: J26.8 R120.1 R129.1
N$103: J26.10 R121.1 R128.1
N$104: J26.12 R122.1 R127.1
N$105: J26.14 R123.1 R126.1
N$106: J26.16 R124.1 R125.1
N$107: J28.2 R133.1 R148.1
N$108: J28.4 R134.1 R147.1
N$109: J28.6 R135.1 R146.1
N$110: J28.8 R136.1 R145.1
N$111: J28.10 R137.1 R144.1
N$112: J28.12 R138.1 R143.1
N$113: J28.14 R139.1 R142.1
N$114: J28.16 R140.1 R141.1
N$115: R149.2 R150.2 U15.1
N$116: C87.1 R109.1
N$117: TP3.P$1 U11.4
N$118: C90.1 U17.4
N$119: C93.2 U16.1
N$120: C97.1 U16.31
N$121: C100.2 U16.5 Y4.2
N$122: C101.2 U16.6 Y4.1
N$123: C104.1 U16.47
N$124: C107.2 U18.18
N$125: C108.2 U18.2
N$126: C108.1 U18.4
N$127: C109.1 U18.5
N$128: R156.1 U18.7
N$129: R157.1 U18.6
N$130: C114.2 U19.2 U19.3
N$131: R159.2 R160.1 U19.4
N$132: J35.4 R162.2
N$133: R163.1 S7.3
N$134: R164.2 S7.1
N$135: LED4.A R165.2
N$136: R166.1 U16.28
N$137: J35.3 SJ13.1
N$138: J36.2 R167.1 R182.1
N$139: J36.4 R168.1 R181.1
N$140: J36.6 R169.1 R180.1
N$141: J36.8 R170.1 R179.1
N$142: J36.10 R171.1 R178.1
N$143: J36.12 R172.1 R177.1
N$144: J36.14 R173.1 R176.1
N$145: J36.16 R174.1 R175.1
N$146: J38.2 R183.1 R198.1
N$147: J38.4 R184.1 R197.1
N$148: J38.6 R185.1 R196.1
N$149: J38.8 R186.1 R195.1
N$150: J38.10 R187.1 R194.1
N$151: J38.12 R188.1 R193.1
N$152: J38.14 R189.1 R192.1
N$153: J38.16 R190.1 R191.1
N$154: R199.2 R200.2 U20.1
N$155: C116.1 R159.1
N$156: TP4.P$1 U16.4
NRST: U4.7
NRST1: U3.7
NRST2: U11.7
NRST3: U16.7
PLAYOUT: J8.2 U4.25
PLAYOUT1: J17.2 U3.25
PLAYOUT2: J27.2 U11.25
PLAYOUT3: J37.2 U16.25
RXD: R14.1 R15.1 U4.43
RXD1: R61.1 R62.1 U3.43
RXD2: R111.1 R112.1 U11.43
RXD3: R161.1 R162.1 U16.43
SD_CD: J3.CD1 J3.CD2 U4.26
SD_CD1: J13.CD1 J13.CD2 U3.26
SD_CD2: J23.CD1 J23.CD2 U11.26
SD_CD3: J33.CD1 J33.CD2 U16.26
SD_CK: J3.5 U4.53
SD_CK1: J13.5 U3.53
SD_CK2: J23.5 U11.53
SD_CK3: J33.5 U16.53
SD_CMD: J3.3 R3.1 U4.54
SD_CMD1: J13.3 R53.1 U3.54
SD_CMD2: J23.3 R103.1 U11.54
SD_CMD3: J33.3 R153.1 U16.54
SD_D0: J3.7 R2.1 U4.39
SD_D1: J3.8 R1.1 U4.40
SD_D2: J3.1 R5.1 U4.51
SD_D3: J3.2 R4.1 U4.52
SD_D4: J13.8 R51.1 U3.40
SD_D5: J13.7 R52.1 U3.39
SD_D6: J13.2 R54.1 U3.52
SD_D7: J13.1 R55.1 U3.51
SD_D8: J23.8 R101.1 U11.40
SD_D9: J23.7 R102.1 U11.39
SD_D10: J23.2 R104.1 U11.52
SD_D11: J23.1 R105.1 U11.51
SD_D12: J33.8 R151.1 U16.40
SD_D13: J33.7 R152.1 U16.39
SD_D14: J33.2 R154.1 U16.52
SD_D15: J33.1 R155.1 U16.51
SPKR+: J5.2 U6.8
SPKR+1: J14.2 U9.8
SPKR+2: J24.2 U14.8
SPKR+3: J34.2 U19.8
SPKR-: J5.1 R10.2 U6.5
SPKR-1: J14.1 R60.2 U9.5
SPKR-2: J24.1 R110.2 U14.5
SPKR-3: J34.1 R160.2 U19.5
TRIG00: R40.2 U4.14
TRIG01: R39.2 U4.15
TRIG02: R38.2 U4.16
TRIG03: R37.2 U4.17
TRIG04: R36.2 U4.20
TRIG05: R35.2 U4.21
TRIG06: R34.2 U4.22
TRIG07: R33.2 U4.23
TRIG08: R11.2 U4.61
TRIG09: R12.2 U4.62
TRIG10: R13.2 U4.29
TRIG11: R18.2 U4.44
TRIG12: R21.2 U4.45
TRIG13: R22.2 U4.46
TRIG14: R23.2 U4.49
TRIG15: R24.2 U4.50
TRIG16: R67.2 U3.14
TRIG17: R68.2 U3.15
TRIG18: R69.2 U3.16
TRIG19: R70.2 U3.17
TRIG20: R71.2 U3.20
TRIG21: R72.2 U3.21
TRIG22: R73.2 U3.22
TRIG23: R74.2 U3.23
TRIG24: R83.2 U3.61
TRIG25: R84.2 U3.62
TRIG26: R85.2 U3.29
TRIG27: R86.2 U3.44
TRIG28: R87.2 U3.45
TRIG29: R88.2 U3.46
TRIG30: R89.2 U3.49
TRIG31: R90.2 U3.50
TRIG32: R117.2 U11.14
TRIG33: R118.2 U11.15
TRIG34: R119.2 U11.16
TRIG35: R120.2 U11.17
TRIG36: R121.2 U11.20
TRIG37: R122.2 U11.21
TRIG38: R123.2 U11.22
TRIG39: R124.2 U11.23
TRIG40: R133.2 U11.61
TRIG41: R134.2 U11.62
TRIG42: R135.2 U11.29
TRIG43: R136.2 U11.44
TRIG44: R137.2 U11.45
TRIG45: R138.2 U11.46
TRIG46: R139.2 U11.49
TRIG47: R140.2 U11.50
TRIG48: R167.2 U16.14
TRIG49: R168.2 U16.15
TRIG50: R169.2 U16.16
TRIG51: R170.2 U16.17
TRIG52: R171.2 U16.20
TRIG53: R172.2 U16.21
TRIG54: R173.2 U16.22
TRIG55: R174.2 U16.23
TRIG56: R183.2 U16.61
TRIG57: R184.2 U16.62
TRIG58: R185.2 U16.29
TRIG59: R186.2 U16.44
TRIG60: R187.2 U16.45
TRIG61: R188.2 U16.46
TRIG62: R189.2 U16.49
TRIG63: R190.2 U16.50
TXD: J4.5 U4.42
TXD1: J15.5 U3.42
TXD2: J25.5 U11.42
TXD3: J35.5 U16.42
VCC: C5.1 C9.1 C10.1 C11.1 C12.1 C13.1 C15.1 C18.1 C19.1 C21.2 C22.1 C26.2 C27.2 J3.4 J8.3 R1.2 R2.2 R3.2 R4.2 R5.2 R14.2 R17.1 R19.1 R25.2 R26.2 R27.2 R28.2 R29.2 R30.2 R31.2 R32.2 R41.2 R42.2 R43.2 R44.2 R45.2 R46.2 R47.2 R48.2 SJ4.1 SJ4.2 U2.5 U4.13 U4.19 U4.32 U4.48 U4.64 U5.1 U5.8 U5.20
VCC1: C33.1 C35.1 C36.1 C37.1 C38.1 C40.1 C41.1 C44.1 C45.1 C47.2 C48.1 C52.2 C53.2 J13.4 J17.3 R51.2 R52.2 R53.2 R54.2 R55.2 R61.2 R64.1 R65.1 R75.2 R76.2 R77.2 R78.2 R79.2 R80.2 R81.2 R82.2 R91.2 R92.2 R93.2 R94.2 R95.2 R96.2 R97.2 R98.2 SJ7.1 SJ7.2 U3.13 U3.19 U3.32 U3.48 U3.64 U7.5 U8.1 U8.8 U8.20
VCC2: C62.1 C64.1 C65.1 C66.1 C67.1 C69.1 C70.1 C73.1 C74.1 C76.2 C77.1 C81.2 C82.2 J23.4 J27.3 R101.2 R102.2 R103.2 R104.2 R105.2 R111.2 R114.1 R115.1 R125.2 R126.2 R127.2 R128.2 R129.2 R130.2 R131.2 R132.2 R141.2 R142.2 R143.2 R144.2 R145.2 R146.2 R147.2 R148.2 SJ11.1 SJ11.2 U11.13 U11.19 U11.32 U11.48 U11.64 U12.5 U13.1 U13.8 U13.20
VCC3: C91.1 C93.1 C94.1 C95.1 C96.1 C98.1 C99.1 C102.1 C103.1 C105.2 C106.1 C110.2 C111.2 J33.4 J37.3 R151.2 R152.2 R153.2 R154.2 R155.2 R161.2 R164.1 R165.1 R175.2 R176.2 R177.2 R178.2 R179.2 R180.2 R181.2 R182.2 R191.2 R192.2 R193.2 R194.2 R195.2 R196.2 R197.2 R198.2 SJ15.1 SJ15.2 U16.13 U16.19 U16.32 U16.48 U16.64 U17.5 U18.1 U18.8 U18.20
VIN: C1.1 J1.VIN0 J9.2 U1.3
VIN1: C34.1 J11.VIN0 J19.2 U10.3
VIN2: C63.1 J21.VIN0 J29.2 U15.3
VIN3: C92.1 J31.VIN0 J39.2 U20.3

## Tracks (layer width: path | path; a pad name or v marks a point on that pad's centre or on a via)
+5V  (via drill 0.51)
  Top 0.254: U6.6 68.91,58.24 69.6,58.93 | 65.15,56.9 66.17,57.91 66.8,57.91 67.44,58.55 67.44,58.93 67.82,59.31 69.22,59.31 69.6,58.93 | 65.15,56.9 65.15,46.74 67.88,44.01 SJ2.2 | v59.18,56.9 65.15,56.9 | 35.94,56.48 U2.3 35.85,56.39 35.18,56.39 34.67,55.88 34.67,54.86 34.16,54.36 33.11,54.36 R49.1 C2.1 33.01,50.93 31.75,50.93 30.66,52.02 U1.4 v28.19,54.48 U1.2 | 35.94,56.48 35.94,57.91 35.31,58.55 33.91,58.55 33.02,59.44 C3.1 | 35.94,56.48 35.94,55.63 36.2,55.37 37.59,55.37 37.72,55.5 37.72,56.36 U2.1 37.85,56.48 37.85,57.4 38.1,57.66 38.86,57.66 39.24,58.04 39.24,59.56 39.75,60.07 SJ3.1 SJ3.2 42.8,60.07 v43.81,59.05 | 70.92,43.94 SJ2.2 | J8.4 72.39,43.56 71.94,44.01 SJ2.2 | 71.05,44.07 SJ2.2 | 69.6,58.93 C31.2
  Bottom 0.254: v59.18,56.9 56.01,60.07 44.83,60.07 v43.81,59.05
  other vias: 25.78,54.48 30.73,54.48 25.15,49.78 28.19,49.78 31.24,49.78 25.15,51.94 31.24,51.94
  pour Top (isolate 0.305): 24.13,56.39 32,56.39 32,48.77 24.13,48.77
  pour Bottom (isolate 0.305): 24.13,48.77 33.02,48.77 33.02,60.2 24.13,60.2
+5V1  (via drill 0.51)
  Top 0.254: U9.6 136.22,58.24 136.91,58.93 | 132.46,56.9 133.48,57.91 134.11,57.91 134.75,58.55 134.75,58.93 135.13,59.31 136.53,59.31 136.91,58.93 | 132.46,56.9 132.46,46.74 135.19,44.01 SJ1.2 | v126.49,56.9 132.46,56.9 | 103.25,56.48 U7.3 103.16,56.39 102.49,56.39 101.98,55.88 101.98,54.86 101.47,54.36 100.42,54.36 R99.1 C7.1 100.32,50.93 99.06,50.93 97.97,52.02 U10.4 v95.5,54.48 U10.2 | 103.25,56.48 103.25,57.91 102.62,58.55 101.22,58.55 100.33,59.44 C8.1 | 103.25,56.48 103.25,55.63 103.5,55.37 104.9,55.37 105.03,55.5 105.03,56.36 U7.1 105.16,56.48 105.16,57.4 105.41,57.66 106.17,57.66 106.55,58.04 106.55,59.56 107.06,60.07 SJ6.1 SJ6.2 110.11,60.07 v111.12,59.05 | 138.23,43.94 SJ1.2 | J17.4 139.7,43.56 139.25,44.01 SJ1.2 | 138.36,44.07 SJ1.2 | 136.91,58.93 C57.2
  Bottom 0.254: v126.49,56.9 123.32,60.07 112.14,60.07 v111.12,59.05
  other vias: 93.09,54.48 98.04,54.48 92.46,49.78 95.5,49.78 98.55,49.78 92.46,51.94 98.55,51.94
  pour Top (isolate 0.305): 91.44,56.39 99.31,56.39 99.31,48.77 91.44,48.77
  pour Bottom (isolate 0.305): 91.44,48.77 100.33,48.77 100.33,60.2 91.44,60.2
+5V2  (via drill 0.51)
  Top 0.254: U14.6 68.91,121.48 69.6,122.17 | 65.15,120.14 66.17,121.16 66.8,121.16 67.44,121.79 67.44,122.17 67.82,122.56 69.22,122.56 69.6,122.17 | 65.15,120.14 65.15,109.98 67.88,107.26 SJ9.2 | v59.18,120.14 65.15,120.14 | 35.94,119.72 U12.3 35.85,119.63 35.18,119.63 34.67,119.13 34.67,118.11 34.16,117.6 33.11,117.6 R149.1 C59.1 31.75,114.17 30.66,115.27 U15.4 v28.19,117.73 U15.2 | 35.94,119.72 35.94,121.16 35.31,121.79 33.91,121.79 33.02,122.68 C60.1 | 35.94,119.72 35.94,118.87 36.2,118.62 37.59,118.62 37.72,118.75 37.72,119.6 U12.1 37.85,119.73 37.85,120.65 38.1,120.9 38.86,120.9 39.24,121.28 39.24,122.81 39.75,123.32 SJ10.1 SJ10.2 42.8,123.32 v43.81,122.3 | 70.92,107.19 SJ9.2 | J27.4 72.39,106.81 71.94,107.26 SJ9.2 | 71.05,107.31 SJ9.2 | 69.6,122.17 C86.2
  Bottom 0.254: v59.18,120.14 56.01,123.32 44.83,123.32 v43.81,122.3
  other vias: 25.78,117.73 30.73,117.73 25.15,113.03 28.19,113.03 31.24,113.03 25.15,115.19 31.24,115.19
  pour Top (isolate 0.305): 24.13,119.63 32,119.63 32,112.01 24.13,112.01
  pour Bottom (isolate 0.305): 24.13,112.01 33.02,112.01 33.02,123.44 24.13,123.44
+5V3  (via drill 0.51)
  Top 0.254: U19.6 136.22,121.48 136.91,122.17 | 132.46,120.14 133.48,121.16 134.11,121.16 134.75,121.79 134.75,122.17 135.13,122.56 136.53,122.56 136.91,122.17 | 132.46,120.14 132.46,109.98 135.19,107.26 SJ13.2 | v126.49,120.14 132.46,120.14 | 103.25,119.72 U17.3 103.16,119.63 102.49,119.63 101.98,119.13 101.98,118.11 101.47,117.6 100.42,117.6 R199.1 C88.1 99.06,114.17 97.97,115.27 U20.4 v95.5,117.73 U20.2 | 103.25,119.72 103.25,121.16 102.62,121.79 101.22,121.79 100.33,122.68 C89.1 | 103.25,119.72 103.25,118.87 103.5,118.62 104.9,118.62 105.03,118.75 105.03,119.6 U17.1 105.16,119.73 105.16,120.65 105.41,120.9 106.17,120.9 106.55,121.28 106.55,122.81 107.06,123.32 SJ14.1 SJ14.2 110.11,123.32 v111.12,122.3 | 138.23,107.19 SJ13.2 | J37.4 139.7,106.81 139.25,107.26 SJ13.2 | 138.36,107.31 SJ13.2 | 136.91,122.17 C115.2
  Bottom 0.254: v126.49,120.14 123.32,123.32 112.14,123.32 v111.12,122.3
  other vias: 93.09,117.73 98.04,117.73 92.46,113.03 95.5,113.03 98.55,113.03 92.46,115.19 98.55,115.19
  pour Top (isolate 0.305): 91.44,119.63 99.31,119.63 99.31,112.01 91.44,112.01
  pour Bottom (isolate 0.305): 91.44,112.01 100.33,112.01 100.33,123.44 91.44,123.44
AMPENA  (via drill 0.25, 0.51)
  Top 0.254: U6.1 67.61,51.86 66.93,51.18 66.93,47.5 v66.42,46.99 | v44.58,27.43 44.81,27.2 U4.11 | v58.29,46.99 55.97,46.99 R8.2
  Bottom 0.254: v44.58,27.43 44.45,27.56 44.45,28.19 43.56,29.08 43.56,42.93 44.7,44.07 55.88,44.07 58.29,46.48 v58.29,46.99 v66.42,46.99
AMPENA1  (via drill 0.25, 0.51)
  Top 0.254: U9.1 134.91,51.86 134.24,51.18 134.24,47.5 v133.73,46.99 | v111.89,27.43 112.12,27.2 U3.11 | v125.6,46.99 123.28,46.99 R58.2
  Bottom 0.254: v111.89,27.43 111.76,27.56 111.76,28.19 110.87,29.08 110.87,42.93 112.01,44.07 123.19,44.07 125.6,46.48 v125.6,46.99 v133.73,46.99
AMPENA2  (via drill 0.25, 0.51)
  Top 0.254: U14.1 67.61,115.1 66.93,114.43 66.93,110.74 v66.42,110.24 | v44.58,90.68 44.81,90.44 U11.11 | v58.29,110.24 55.97,110.24 R108.2
  Bottom 0.254: v44.58,90.68 44.45,90.81 44.45,91.44 43.56,92.33 43.56,106.17 44.7,107.31 55.88,107.31 58.29,109.73 v58.29,110.24 v66.42,110.24
AMPENA3  (via drill 0.25, 0.51)
  Top 0.254: U19.1 134.91,115.1 134.24,114.43 134.24,110.74 v133.73,110.24 | v111.89,90.68 112.12,90.44 U16.11 | v125.6,110.24 123.28,110.24 R158.2
  Bottom 0.254: v111.89,90.68 111.76,90.81 111.76,91.44 110.87,92.33 110.87,106.17 112.01,107.31 123.19,107.31 125.6,109.73 v125.6,110.24 v133.73,110.24
BOOT0  (via drill 0.51)
  Top 0.254: v41.53,37.21 45.47,37.21 46.74,35.94 50.93,35.94 51.59,35.15 U4.60 | S1.2 19.94,60.47 19.94,59.31 20.19,59.05 22.61,59.05 23.24,58.42 v23.24,56.9
  Bottom 0.254: v41.53,37.21 41.53,41.15 38.99,43.69 25.15,43.69 23.37,45.47 23.37,56.77 v23.24,56.9
BOOT1  (via drill 0.51)
  Top 0.254: v108.84,37.21 112.78,37.21 114.05,35.94 118.24,35.94 118.9,35.15 U3.60 | S3.2 87.25,60.47 87.25,59.31 87.5,59.05 89.92,59.05 90.55,58.42 v90.55,56.9
  Bottom 0.254: v108.84,37.21 108.84,41.15 106.3,43.69 92.46,43.69 90.68,45.47 90.68,56.77 v90.55,56.9
BOOT2  (via drill 0.51)
  Top 0.254: v41.53,100.46 45.47,100.46 46.74,99.19 50.93,99.19 51.59,98.4 U11.60 | S5.2 19.94,123.71 19.94,122.56 20.19,122.3 22.61,122.3 23.24,121.67 v23.24,120.14
  Bottom 0.254: v41.53,100.46 41.53,104.39 38.99,106.93 25.15,106.93 23.37,108.71 23.37,120.02 v23.24,120.14
BOOT3  (via drill 0.51)
  Top 0.254: v108.84,100.46 112.78,100.46 114.05,99.19 118.24,99.19 118.9,98.4 U16.60 | S7.2 87.25,123.71 87.25,122.56 87.5,122.3 89.92,122.3 90.55,121.67 v90.55,120.14
  Bottom 0.254: v108.84,100.46 108.84,104.39 106.3,106.93 92.46,106.93 90.68,108.71 90.68,120.02 v90.55,120.14
BUTTON  (via drill 0.25)
  Top 0.254: U4.27 54.59,21.82 v54.36,21.59 | v50.67,17.78 49.78,17.78 48.64,18.92 47.37,18.92 v46.35,17.91 | v16.38,13.21 15.37,13.21 15.11,13.46 S2.3
  Bottom 0.254: v54.36,21.59 54.36,20.7 52.32,18.67 51.56,18.67 v50.67,17.78 | v46.35,17.91 45.97,17.91 40.64,12.57 17.02,12.57 v16.38,13.21
BUTTON1  (via drill 0.25)
  Top 0.254: U3.27 121.9,21.82 v121.67,21.59 | v117.98,17.78 117.09,17.78 115.95,18.92 114.68,18.92 v113.67,17.91 | v83.69,13.21 82.68,13.21 82.42,13.46 S4.3
  Bottom 0.254: v121.67,21.59 121.67,20.7 119.63,18.67 118.87,18.67 v117.98,17.78 | v113.67,17.91 113.28,17.91 107.95,12.57 84.33,12.57 v83.69,13.21
BUTTON2  (via drill 0.25)
  Top 0.254: U11.27 54.59,85.07 v54.36,84.84 | v50.67,81.03 49.78,81.03 48.64,82.17 47.37,82.17 v46.35,81.15 | v16.38,76.45 15.37,76.45 15.11,76.71 S6.3
  Bottom 0.254: v54.36,84.84 54.36,83.95 52.32,81.92 51.56,81.92 v50.67,81.03 | v46.35,81.15 45.97,81.15 40.64,75.82 17.02,75.82 v16.38,76.45
BUTTON3  (via drill 0.25)
  Top 0.254: U16.27 121.9,85.07 v121.67,84.84 | v117.98,81.03 117.09,81.03 115.95,82.17 114.68,82.17 v113.67,81.15 | v83.69,76.45 82.68,76.45 82.42,76.71 S8.3
  Bottom 0.254: v121.67,84.84 121.67,83.95 119.63,81.92 118.87,81.92 v117.98,81.03 | v113.67,81.15 113.28,81.15 107.95,75.82 84.33,75.82 v83.69,76.45
DEMP  (via drill 0.25)
  Top 0.254: U5.10 v45.34,54.11 v45.34,54.1 | v45.34,51.94 44.7,51.31 44.7,43.31 43.69,42.29 43.69,41.53 44.58,40.64 v45.72,40.64 | U4.10 49.14,27.7 v49.15,27.69
  Bottom 0.254: v45.34,51.94 v45.34,54.1 | v45.72,40.64 45.59,40.51 45.59,33.66 48.26,30.99 48.26,28.57 v49.15,27.69
DEMP1  (via drill 0.25)
  Top 0.254: U8.10 v112.64,54.11 v112.65,54.1 | v112.65,51.94 112.01,51.31 112.01,43.31 111,42.29 111,41.53 111.89,40.64 v113.03,40.64 | U3.10 116.45,27.7 v116.46,27.69
  Bottom 0.254: v112.65,51.94 v112.65,54.1 | v113.03,40.64 112.9,40.51 112.9,33.66 115.57,30.99 115.57,28.57 v116.46,27.69
DEMP2  (via drill 0.25)
  Top 0.254: U13.10 v45.34,117.35 | v45.34,115.19 44.7,114.55 44.7,106.55 43.69,105.54 43.69,104.78 44.58,103.89 v45.72,103.89 | U11.10 49.14,90.94 v49.15,90.93
  Bottom 0.254: v45.34,115.19 v45.34,117.35 | v45.72,103.89 45.59,103.76 45.59,96.9 48.26,94.23 48.26,91.82 v49.15,90.93
DEMP3  (via drill 0.25)
  Top 0.254: U18.10 v112.64,117.35 v112.65,117.35 | v112.65,115.19 112.01,114.55 112.01,106.55 111,105.54 111,104.78 111.89,103.89 v113.03,103.89 | U16.10 116.45,90.94 v116.46,90.93
  Bottom 0.254: v112.65,115.19 v112.65,117.35 | v113.03,103.89 112.9,103.76 112.9,96.9 115.57,94.23 115.57,91.82 v116.46,90.93
FILTER  (via drill 0.25)
  Top 0.254: U5.11 45.34,42.67 v44.7,42.04 | v45.59,27.94 46.35,27.94 46.61,28.2 U4.9
  Bottom 0.254: v45.59,27.94 44.2,29.34 44.2,41.53 v44.7,42.04
FILTER1  (via drill 0.25)
  Top 0.254: U8.11 112.64,42.67 v112.01,42.04 | v112.9,27.94 113.67,27.94 113.92,28.2 U3.9
  Bottom 0.254: v112.9,27.94 111.51,29.34 111.51,41.53 v112.01,42.04
FILTER2  (via drill 0.25)
  Top 0.254: U13.11 45.34,105.91 v44.7,105.28 | v45.59,91.19 46.35,91.19 46.61,91.44 U11.9
  Bottom 0.254: v45.59,91.19 44.2,92.58 44.2,104.78 v44.7,105.28
FILTER3  (via drill 0.25)
  Top 0.254: U18.11 112.64,105.91 v112.01,105.28 | v112.9,91.19 113.67,91.19 113.92,91.44 U16.9
  Bottom 0.254: v112.9,91.19 111.51,92.58 111.51,104.78 v112.01,105.28
GND  (via drill 0.25)
  Top 0.203: R20.2 57.15,17.65 57.59,17.27 v57.59,12.7
  Top 0.254: C27.1 44.74,62.32 43.43,63.63 SJ5.2 SJ5.1 39.24,63.63 | U4.63 50.09,35.13 49.78,35.43 49.28,35.43 48.64,34.8 C18.2 | U4.18 50.09,23.93 50.93,24.77 50.93,25.4 50.8,25.53 50.8,26.67 v50.93,26.8 | U5.19 50.53,48.91 51.18,48.26 | 52.07,47.62 52.07,45.59 51.82,45.34 50.84,45.34 C23.1 | v43.69,26.54 43.84,26.7 U4.12 48.8,26.7 v48.83,26.73
  Bottom 0.254: v57.59,12.7 57.15,13.21 | v50.93,26.8 v48.83,26.73
  other vias: 40.51,29.46 68.2,58.55 68.07,60.45 69.85,47.5 50.04,59.18 43.18,56.13 43.18,47.75 52.07,48.13 61.98,35.94 68.45,18.29 62.48,21.84 48.39,34.8 14.1,34.8 40.01,52.58 49.4,51.18 36.83,47.75 31.37,47.75 35.56,62.74 46.99,63.75 59.44,59.31
  pour Bottom (isolate 0.305, rank 2): 10.16,65.28 10.16,6.86 73.66,6.86 73.66,41.15 42.8,41.15 40.64,43.18 40.64,65.28
  pour Top (isolate 0.305, rank 2): 10.16,65.28 10.16,6.86 73.66,6.86 73.66,41.15 42.8,41.15 40.64,43.18 40.64,65.28
  pour Top (isolate 0.305): 41.91,65.28 41.91,43.69 43.18,42.42 73.66,42.42 73.66,65.28
  pour Bottom (isolate 0.305): 41.91,65.28 41.91,43.69 43.18,42.42 73.66,42.42 73.66,65.28
GND1  (via drill 0.25)
  Top 0.203: R66.2 124.46,17.65 124.9,17.27 v124.9,12.7
  Top 0.254: C53.1 112.05,62.32 110.74,63.63 SJ8.2 SJ8.1 106.55,63.63 | U3.63 117.4,35.13 117.09,35.43 116.59,35.43 115.95,34.8 C44.2 | U3.18 117.4,23.93 118.24,24.77 118.24,25.4 118.11,25.53 118.11,26.67 v118.24,26.8 | U8.19 117.84,48.91 118.49,48.26 | 119.38,47.62 119.38,45.59 119.13,45.34 118.15,45.34 C49.1 | v111,26.54 111.15,26.7 U3.12 116.11,26.7 v116.14,26.73
  Bottom 0.254: v124.9,12.7 124.46,13.21 | v118.24,26.8 v116.14,26.73
  other vias: 107.82,29.46 135.51,58.55 135.38,60.45 137.16,47.5 117.35,59.18 110.49,56.13 110.49,47.75 119.38,48.13 129.29,35.94 135.76,18.29 129.79,21.84 115.7,34.8 81.41,34.8 107.31,52.58 116.71,51.18 104.14,47.75 98.68,47.75 102.87,62.74 114.3,63.75 126.75,59.31
  pour Bottom (isolate 0.305, rank 2): 77.47,65.28 77.47,6.86 140.97,6.86 140.97,41.15 110.11,41.15 107.95,43.18 107.95,65.28
  pour Top (isolate 0.305, rank 2): 77.47,65.28 77.47,6.86 140.97,6.86 140.97,41.15 110.11,41.15 107.95,43.18 107.95,65.28
  pour Top (isolate 0.305): 109.22,65.28 109.22,43.69 110.49,42.42 140.97,42.42 140.97,65.28
  pour Bottom (isolate 0.305): 109.22,65.28 109.22,43.69 110.49,42.42 140.97,42.42 140.97,65.28
GND2  (via drill 0.25)
  Top 0.203: R116.2 57.15,80.9 57.59,80.52 v57.59,75.95
  Top 0.254: C82.1 44.74,125.56 43.43,126.87 SJ12.2 SJ12.1 39.24,126.87 | U11.63 50.09,98.37 49.78,98.68 49.28,98.68 48.64,98.04 C73.2 | U11.18 50.09,87.17 50.93,88.01 50.93,88.65 50.8,88.77 50.8,89.92 v50.93,90.04 | U13.19 50.53,112.15 51.18,111.51 | 52.07,110.87 52.07,108.84 51.82,108.58 50.84,108.58 C78.1 | v43.69,89.79 43.84,89.94 U11.12 48.8,89.94 v48.83,89.98
  Bottom 0.254: v57.59,75.95 57.15,76.45 | v50.93,90.04 v48.83,89.98
  other vias: 40.51,92.71 68.2,121.79 68.07,123.7 69.85,110.74 50.04,122.43 43.18,119.38 43.18,111 52.07,111.38 61.98,99.19 68.45,81.53 62.48,85.09 48.39,98.04 14.1,98.04 40.01,115.82 49.4,114.43 36.83,111 31.37,111 35.56,125.98 46.99,127 59.44,122.56
  pour Bottom (isolate 0.305, rank 2): 10.16,128.52 10.16,70.1 73.66,70.1 73.66,104.39 42.8,104.39 40.64,106.43 40.64,128.52